# Altium PCB 175-00024_rev1, Backplane, 19-inch Rack_OLD.PcbDoc (part 1 of 3)
Units mil, origin at the board's own origin, x right, y up, seen from the top; angles counter-clockwise.
Board outline 8400 x 10183.07 mil, 7 copper layers (Top Layer (*.GTL), Mid-Layer 1, +24V, RTN, +12V, Signal GND, Bottom Layer); 183 components, 151 nets, 1419 pads, 357 vias.
Unrouted connection lines stored in the file: 135.
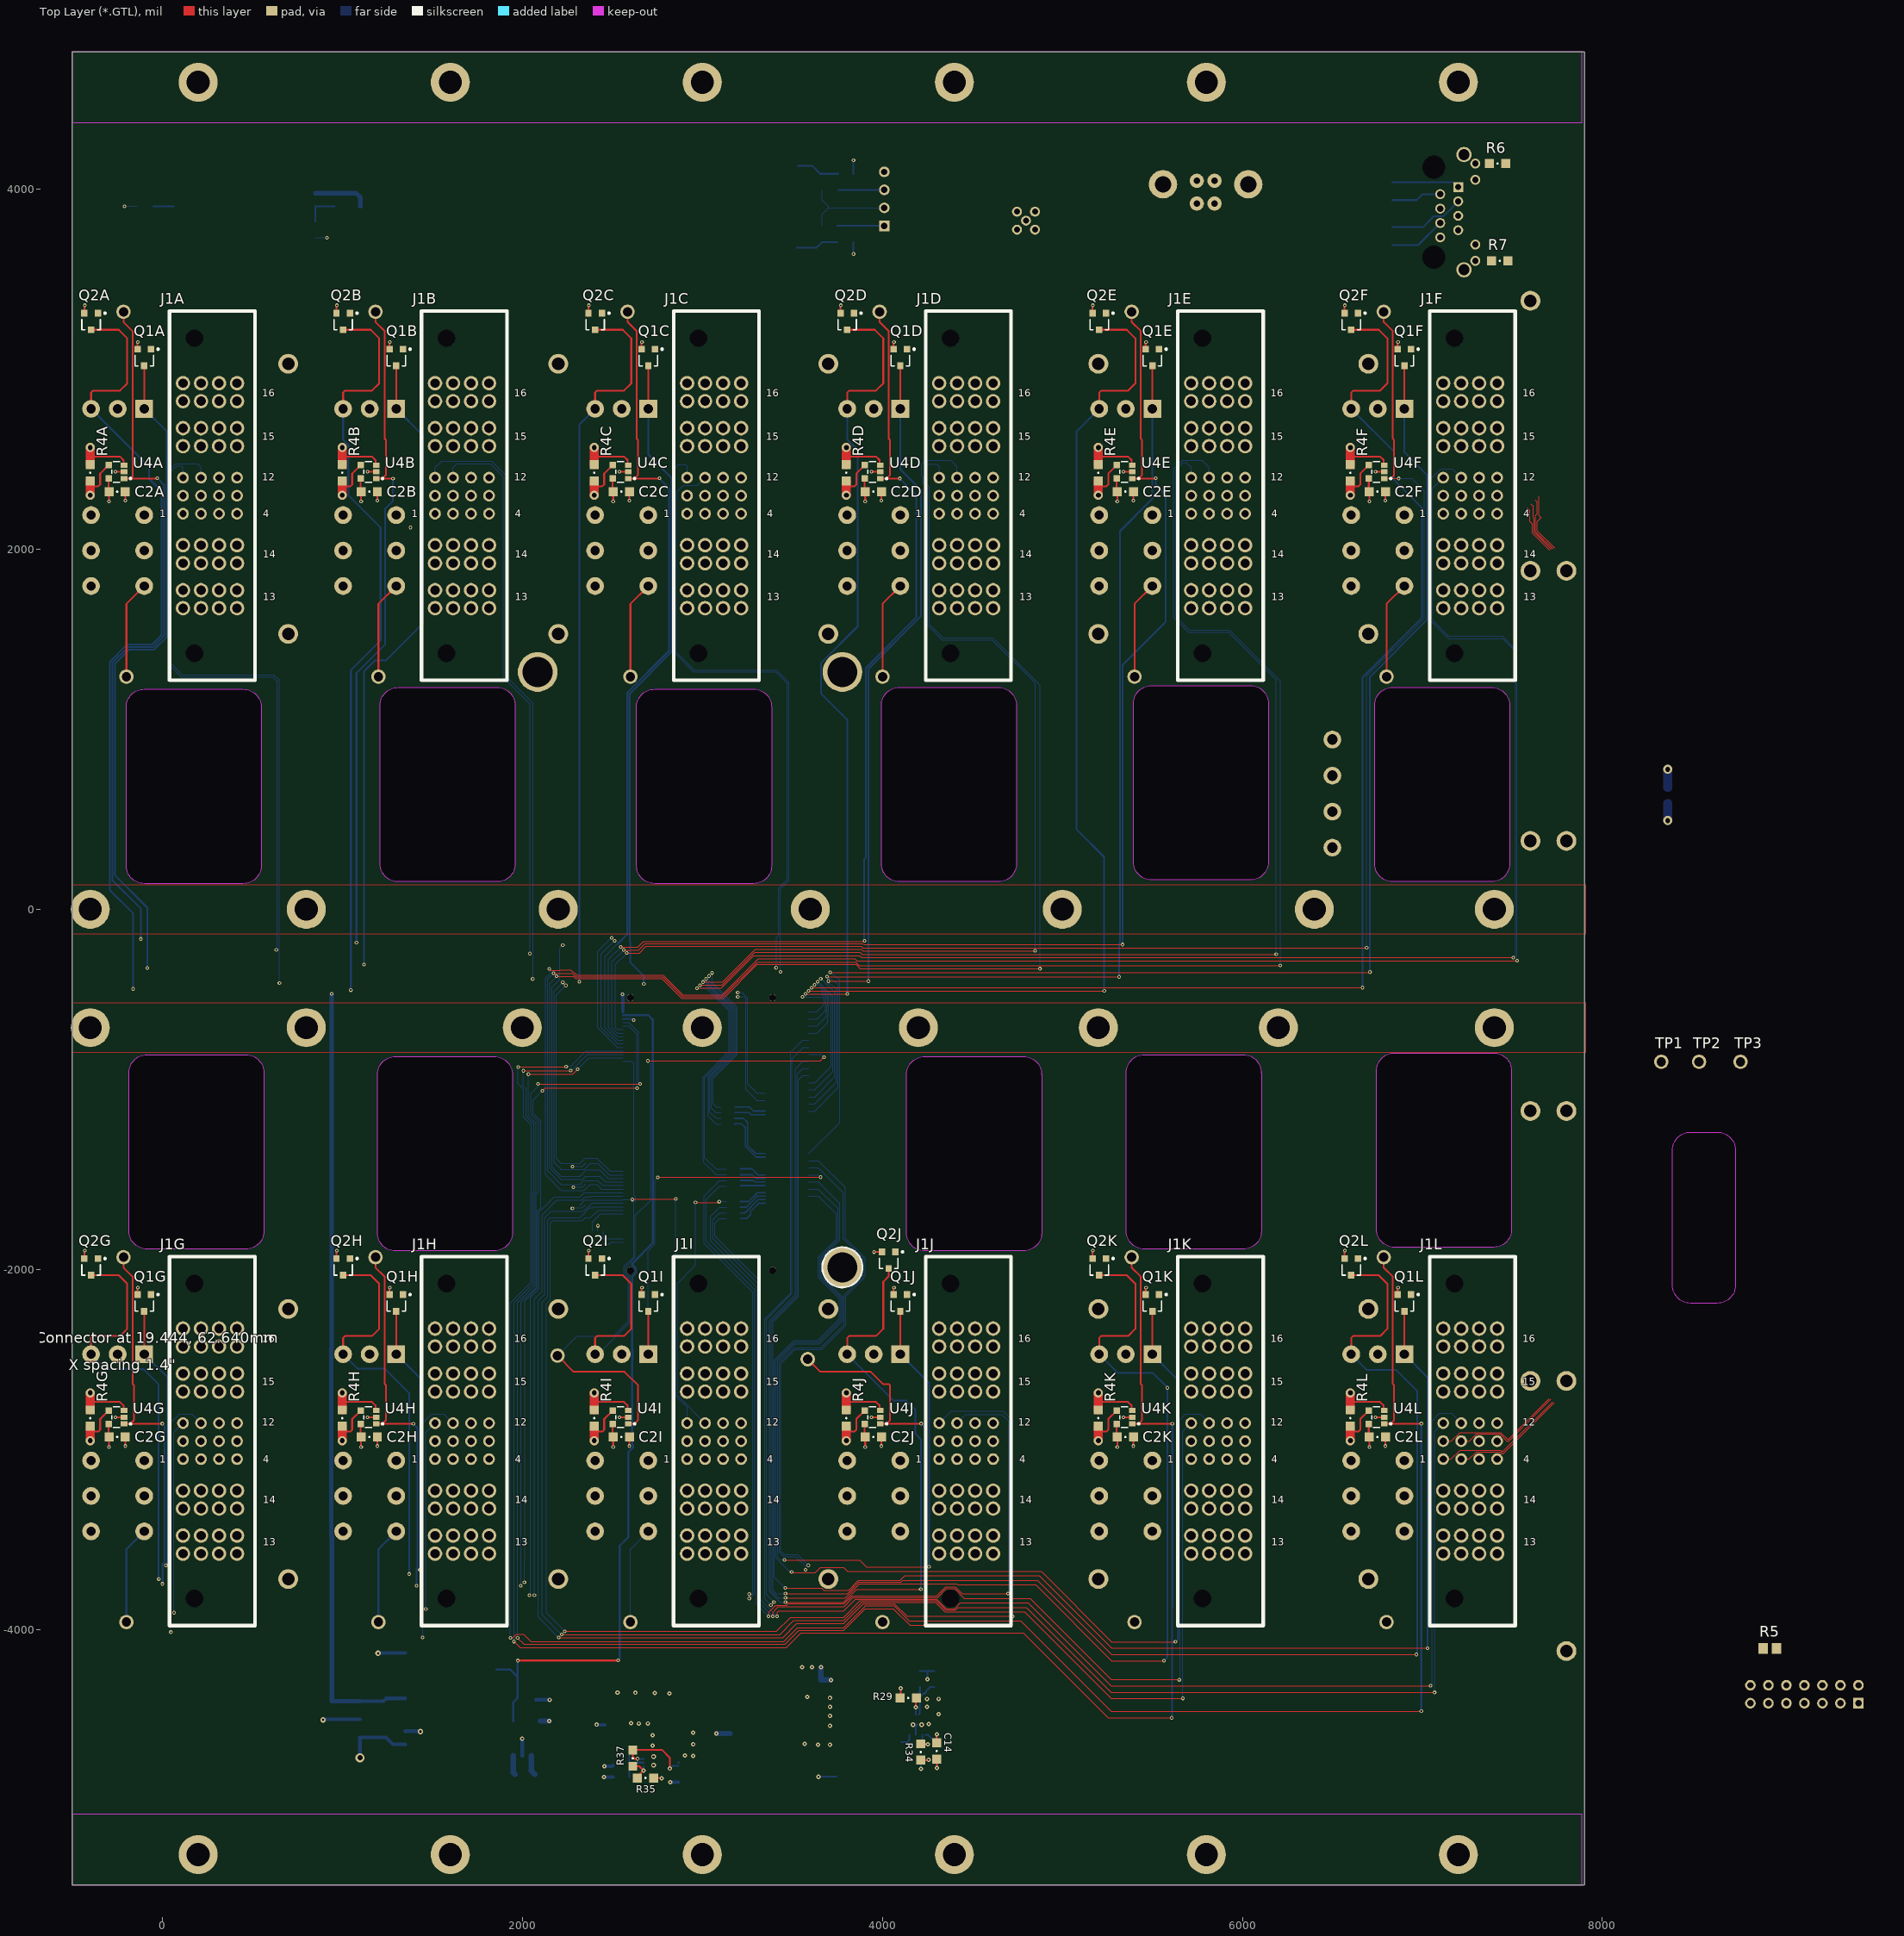
[diagram p0: Top Layer (*.GTL) view]
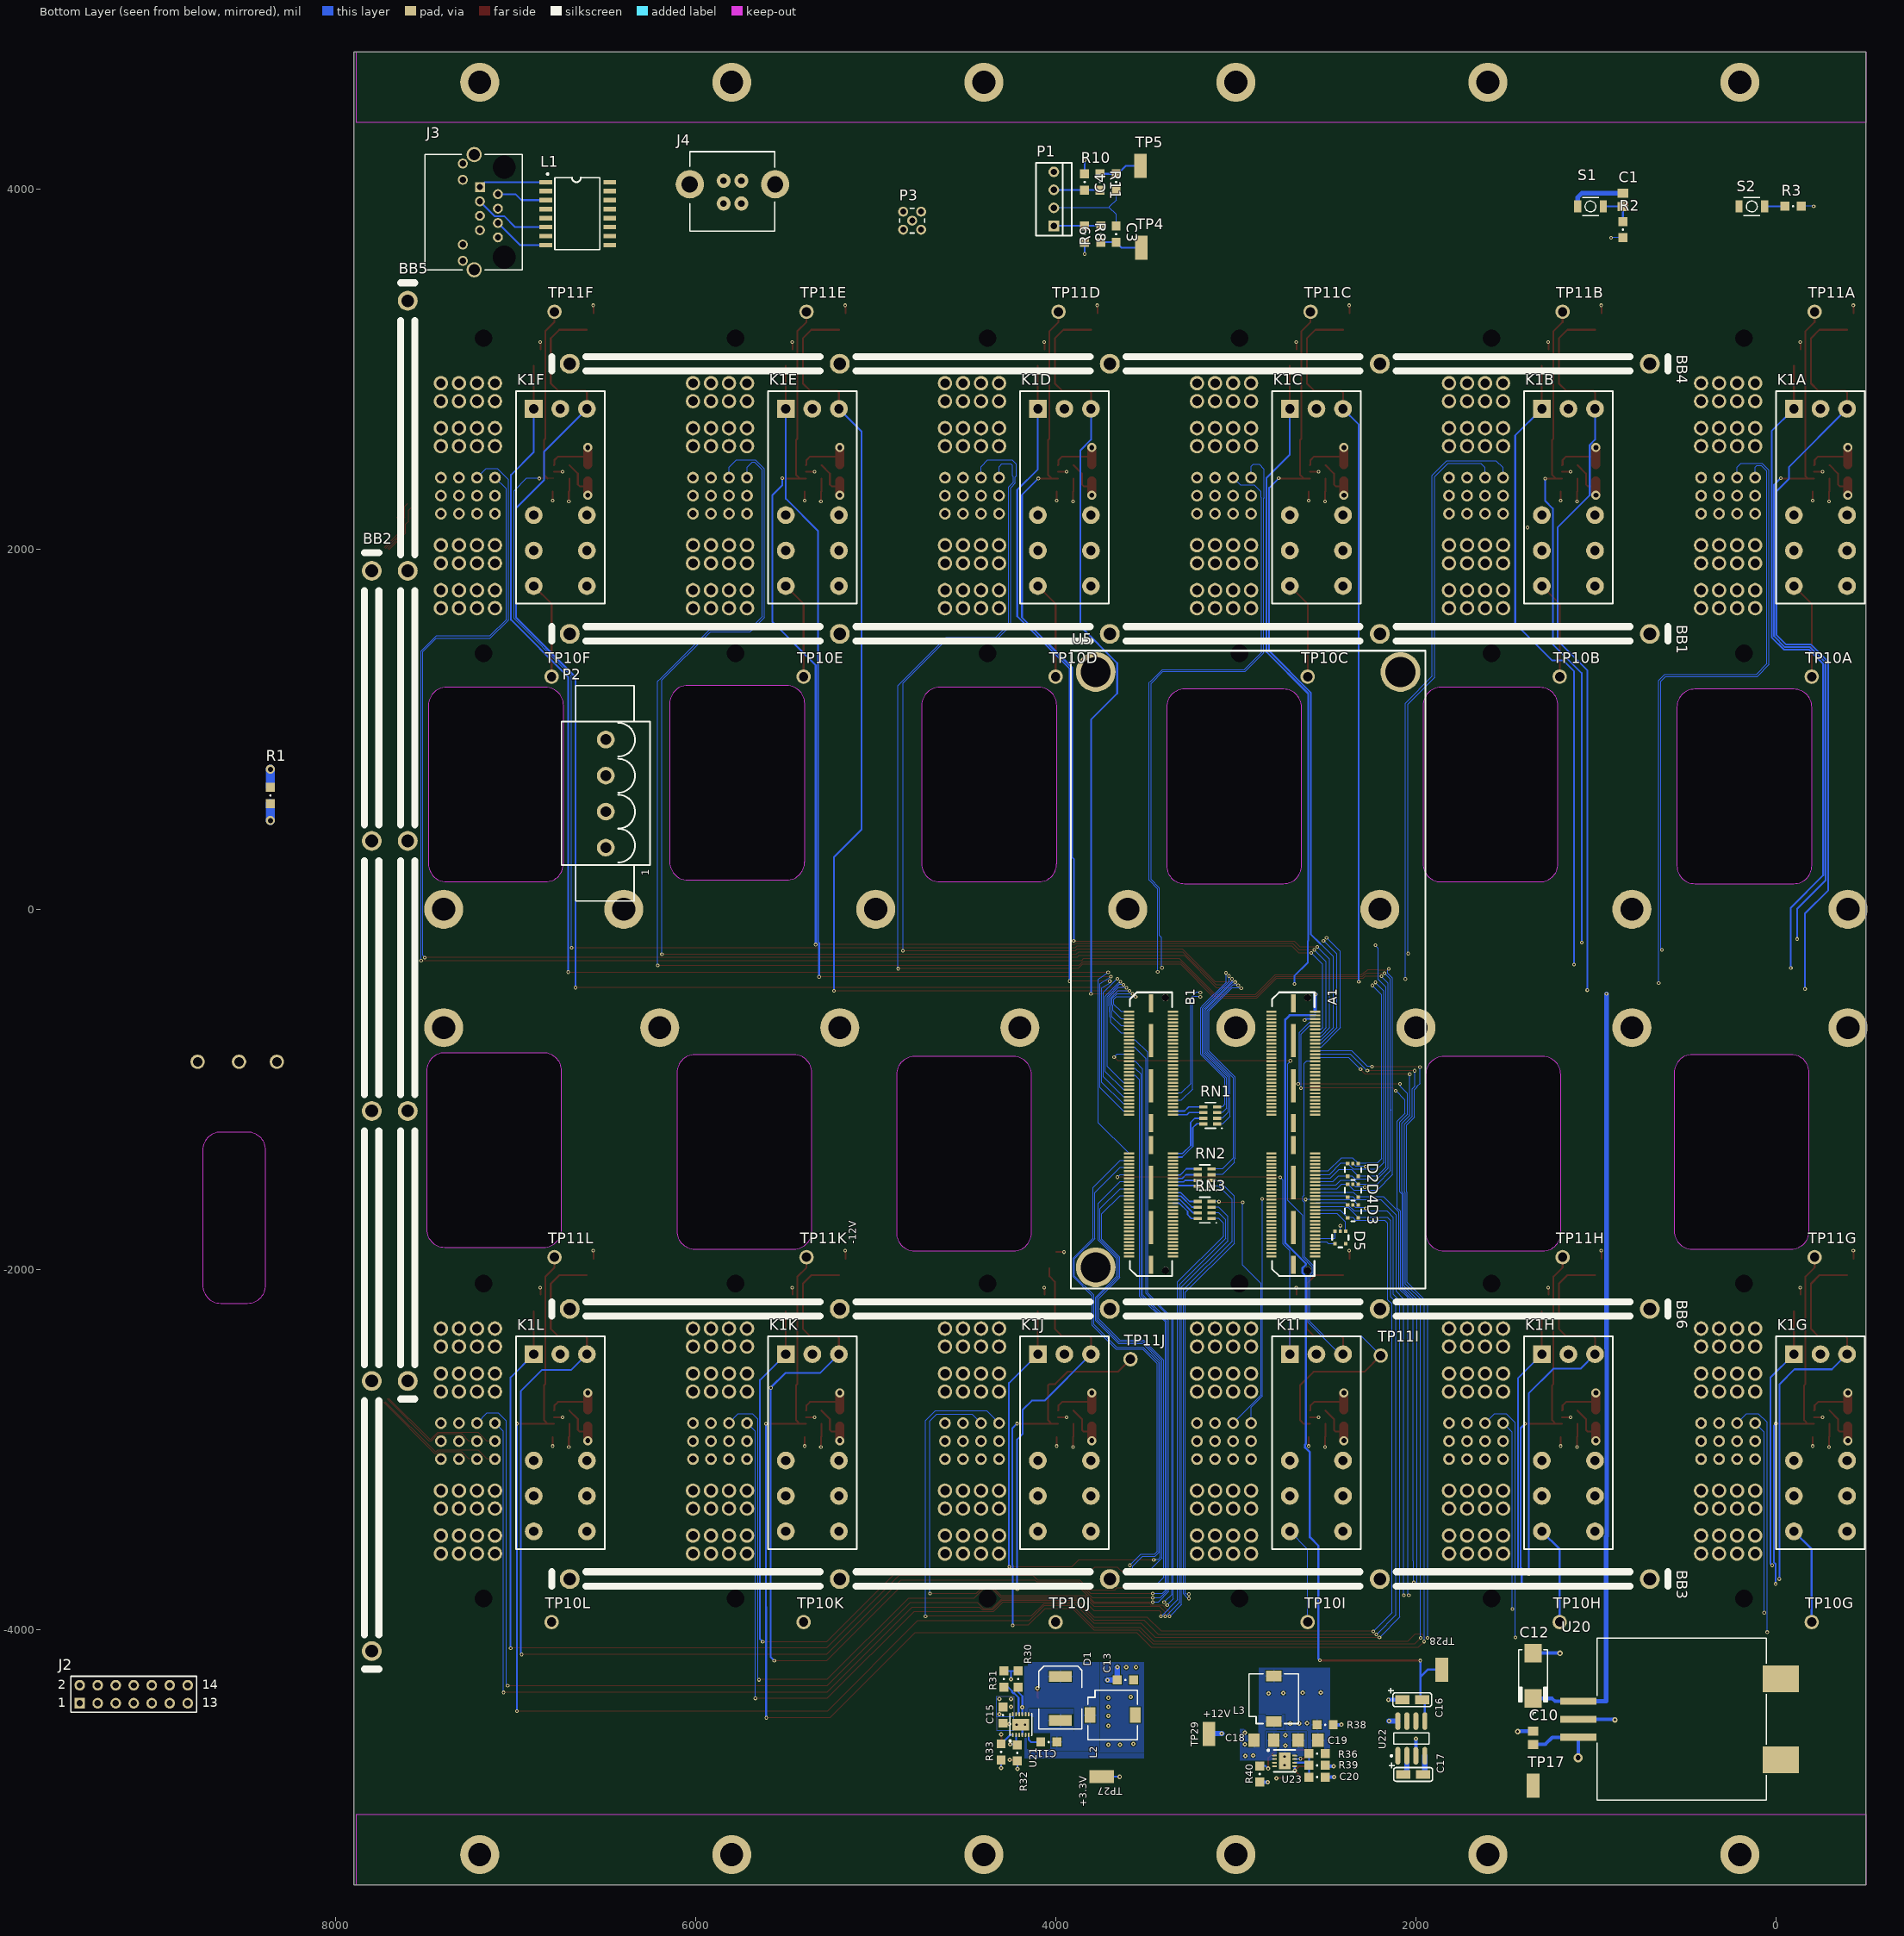
[diagram p1: Bottom Layer view, seen from below]
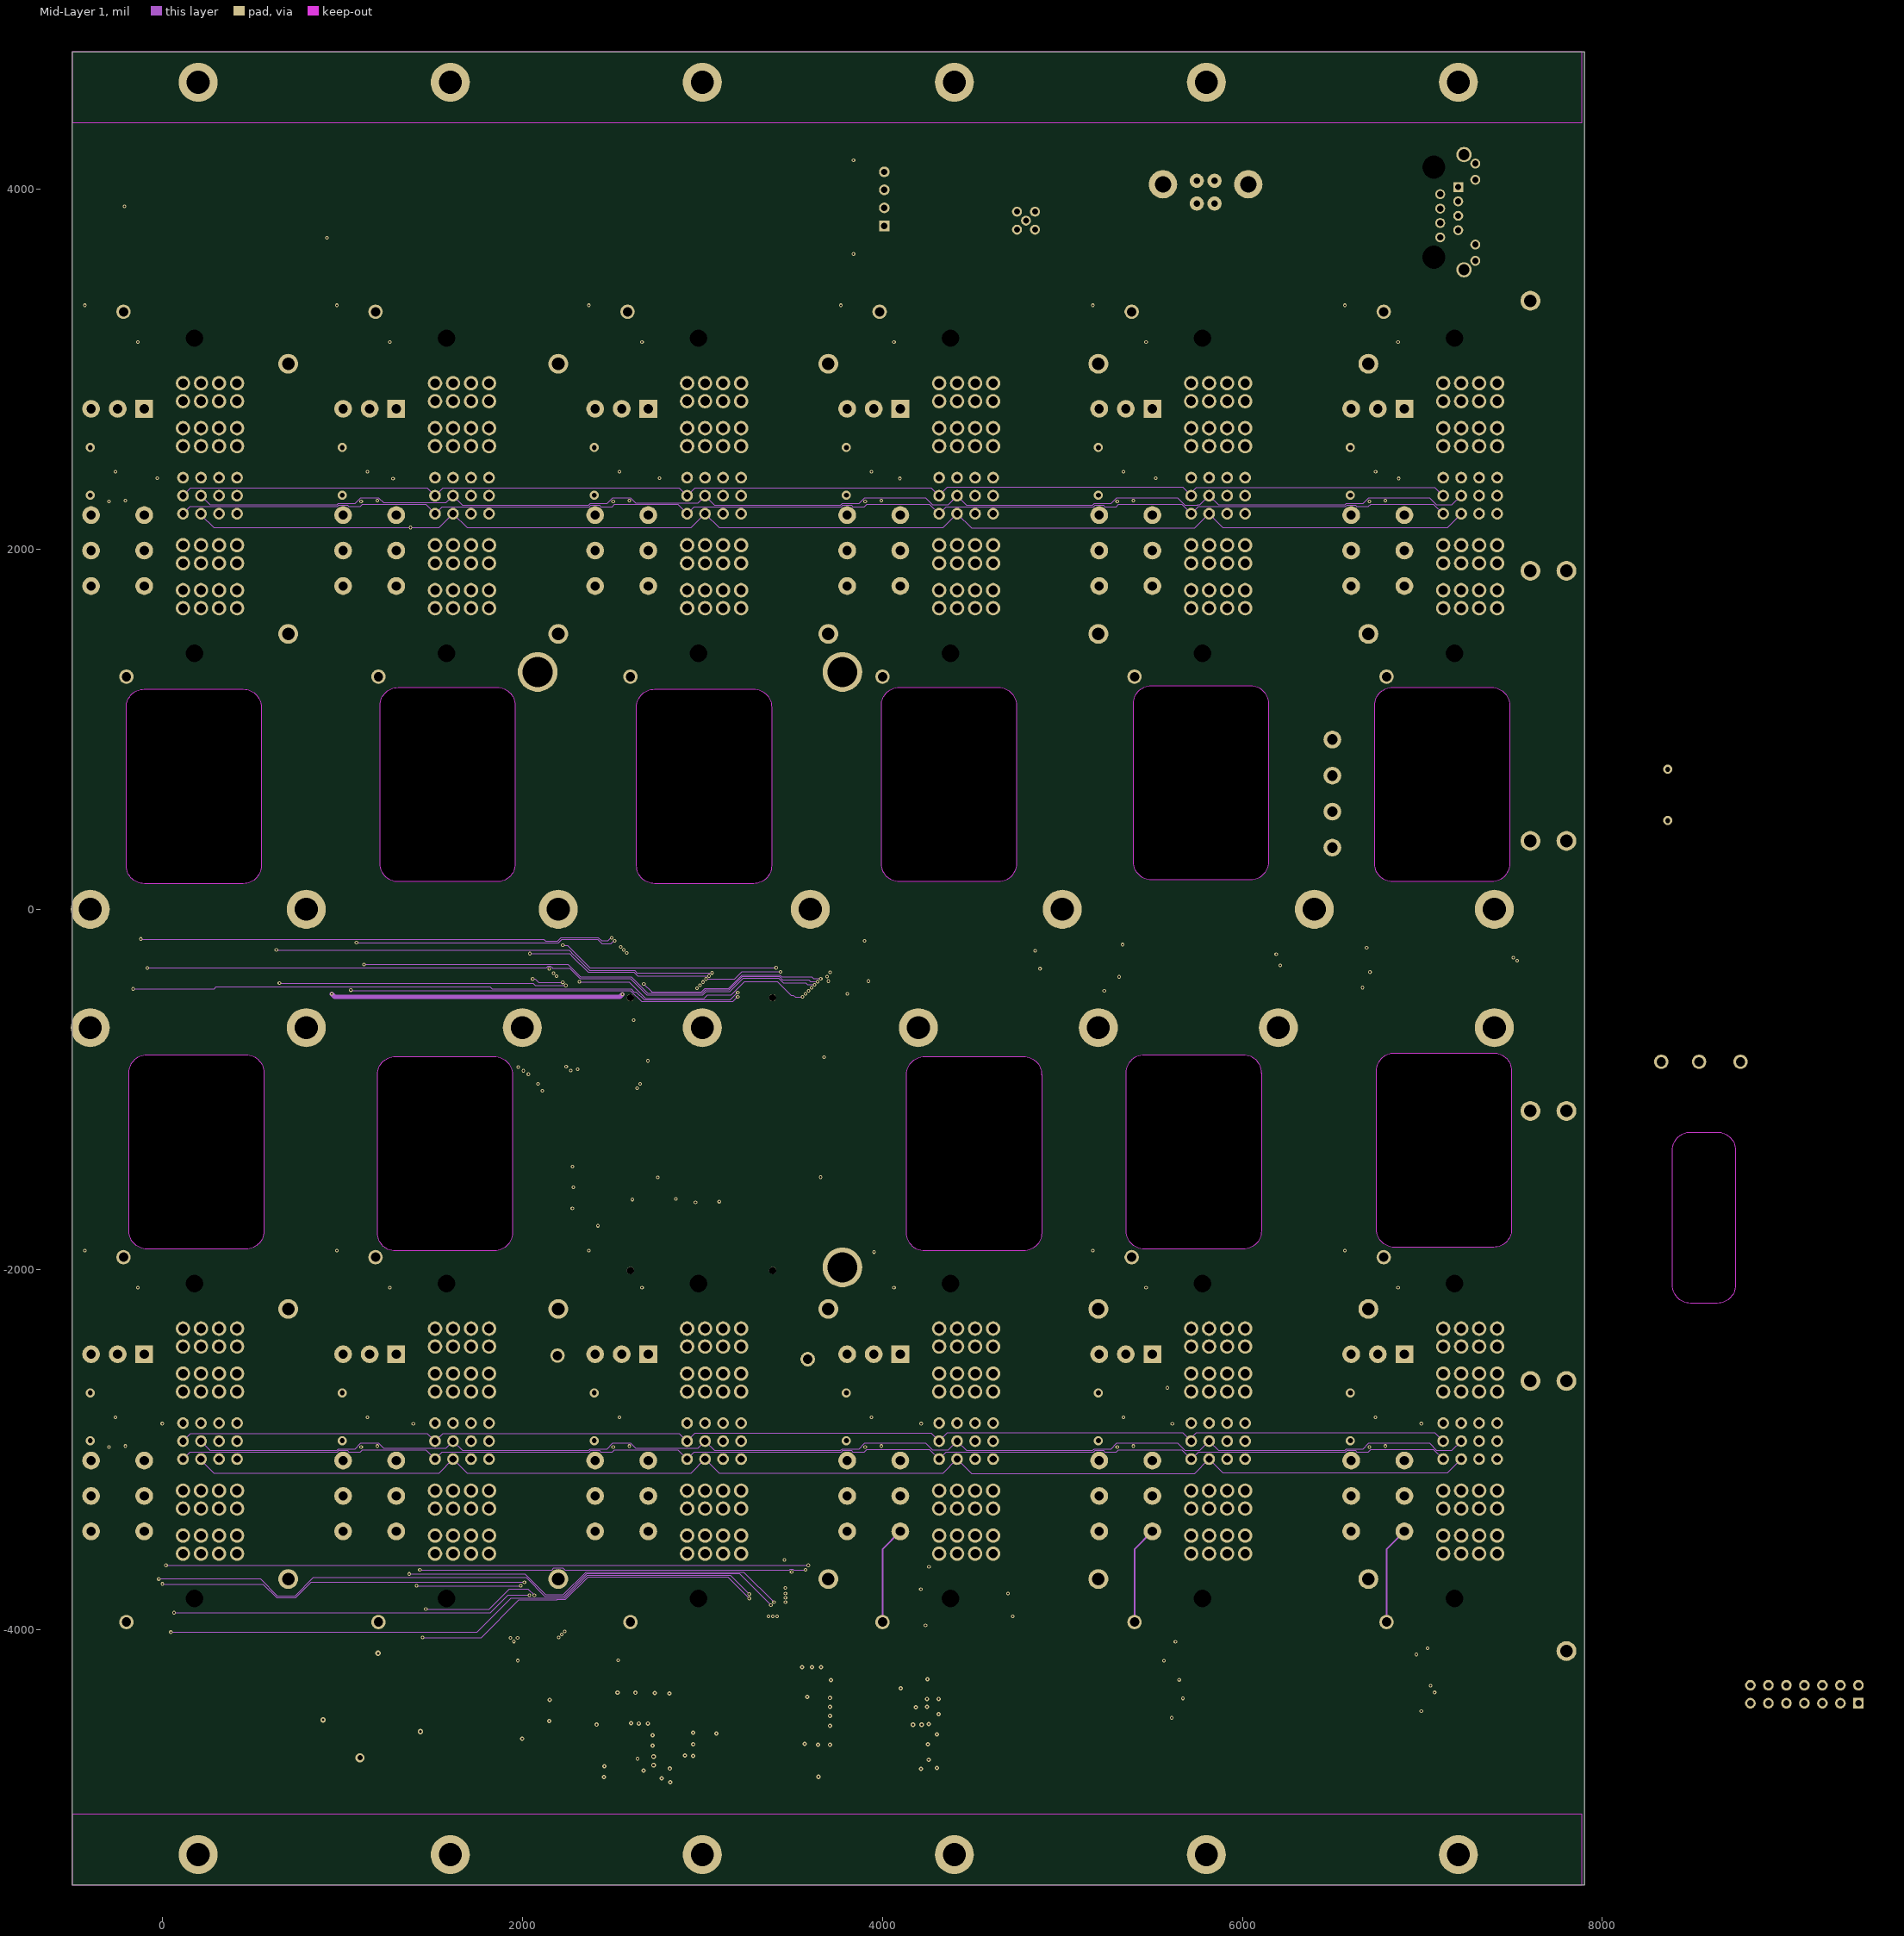
[diagram p2: Mid-Layer 1]
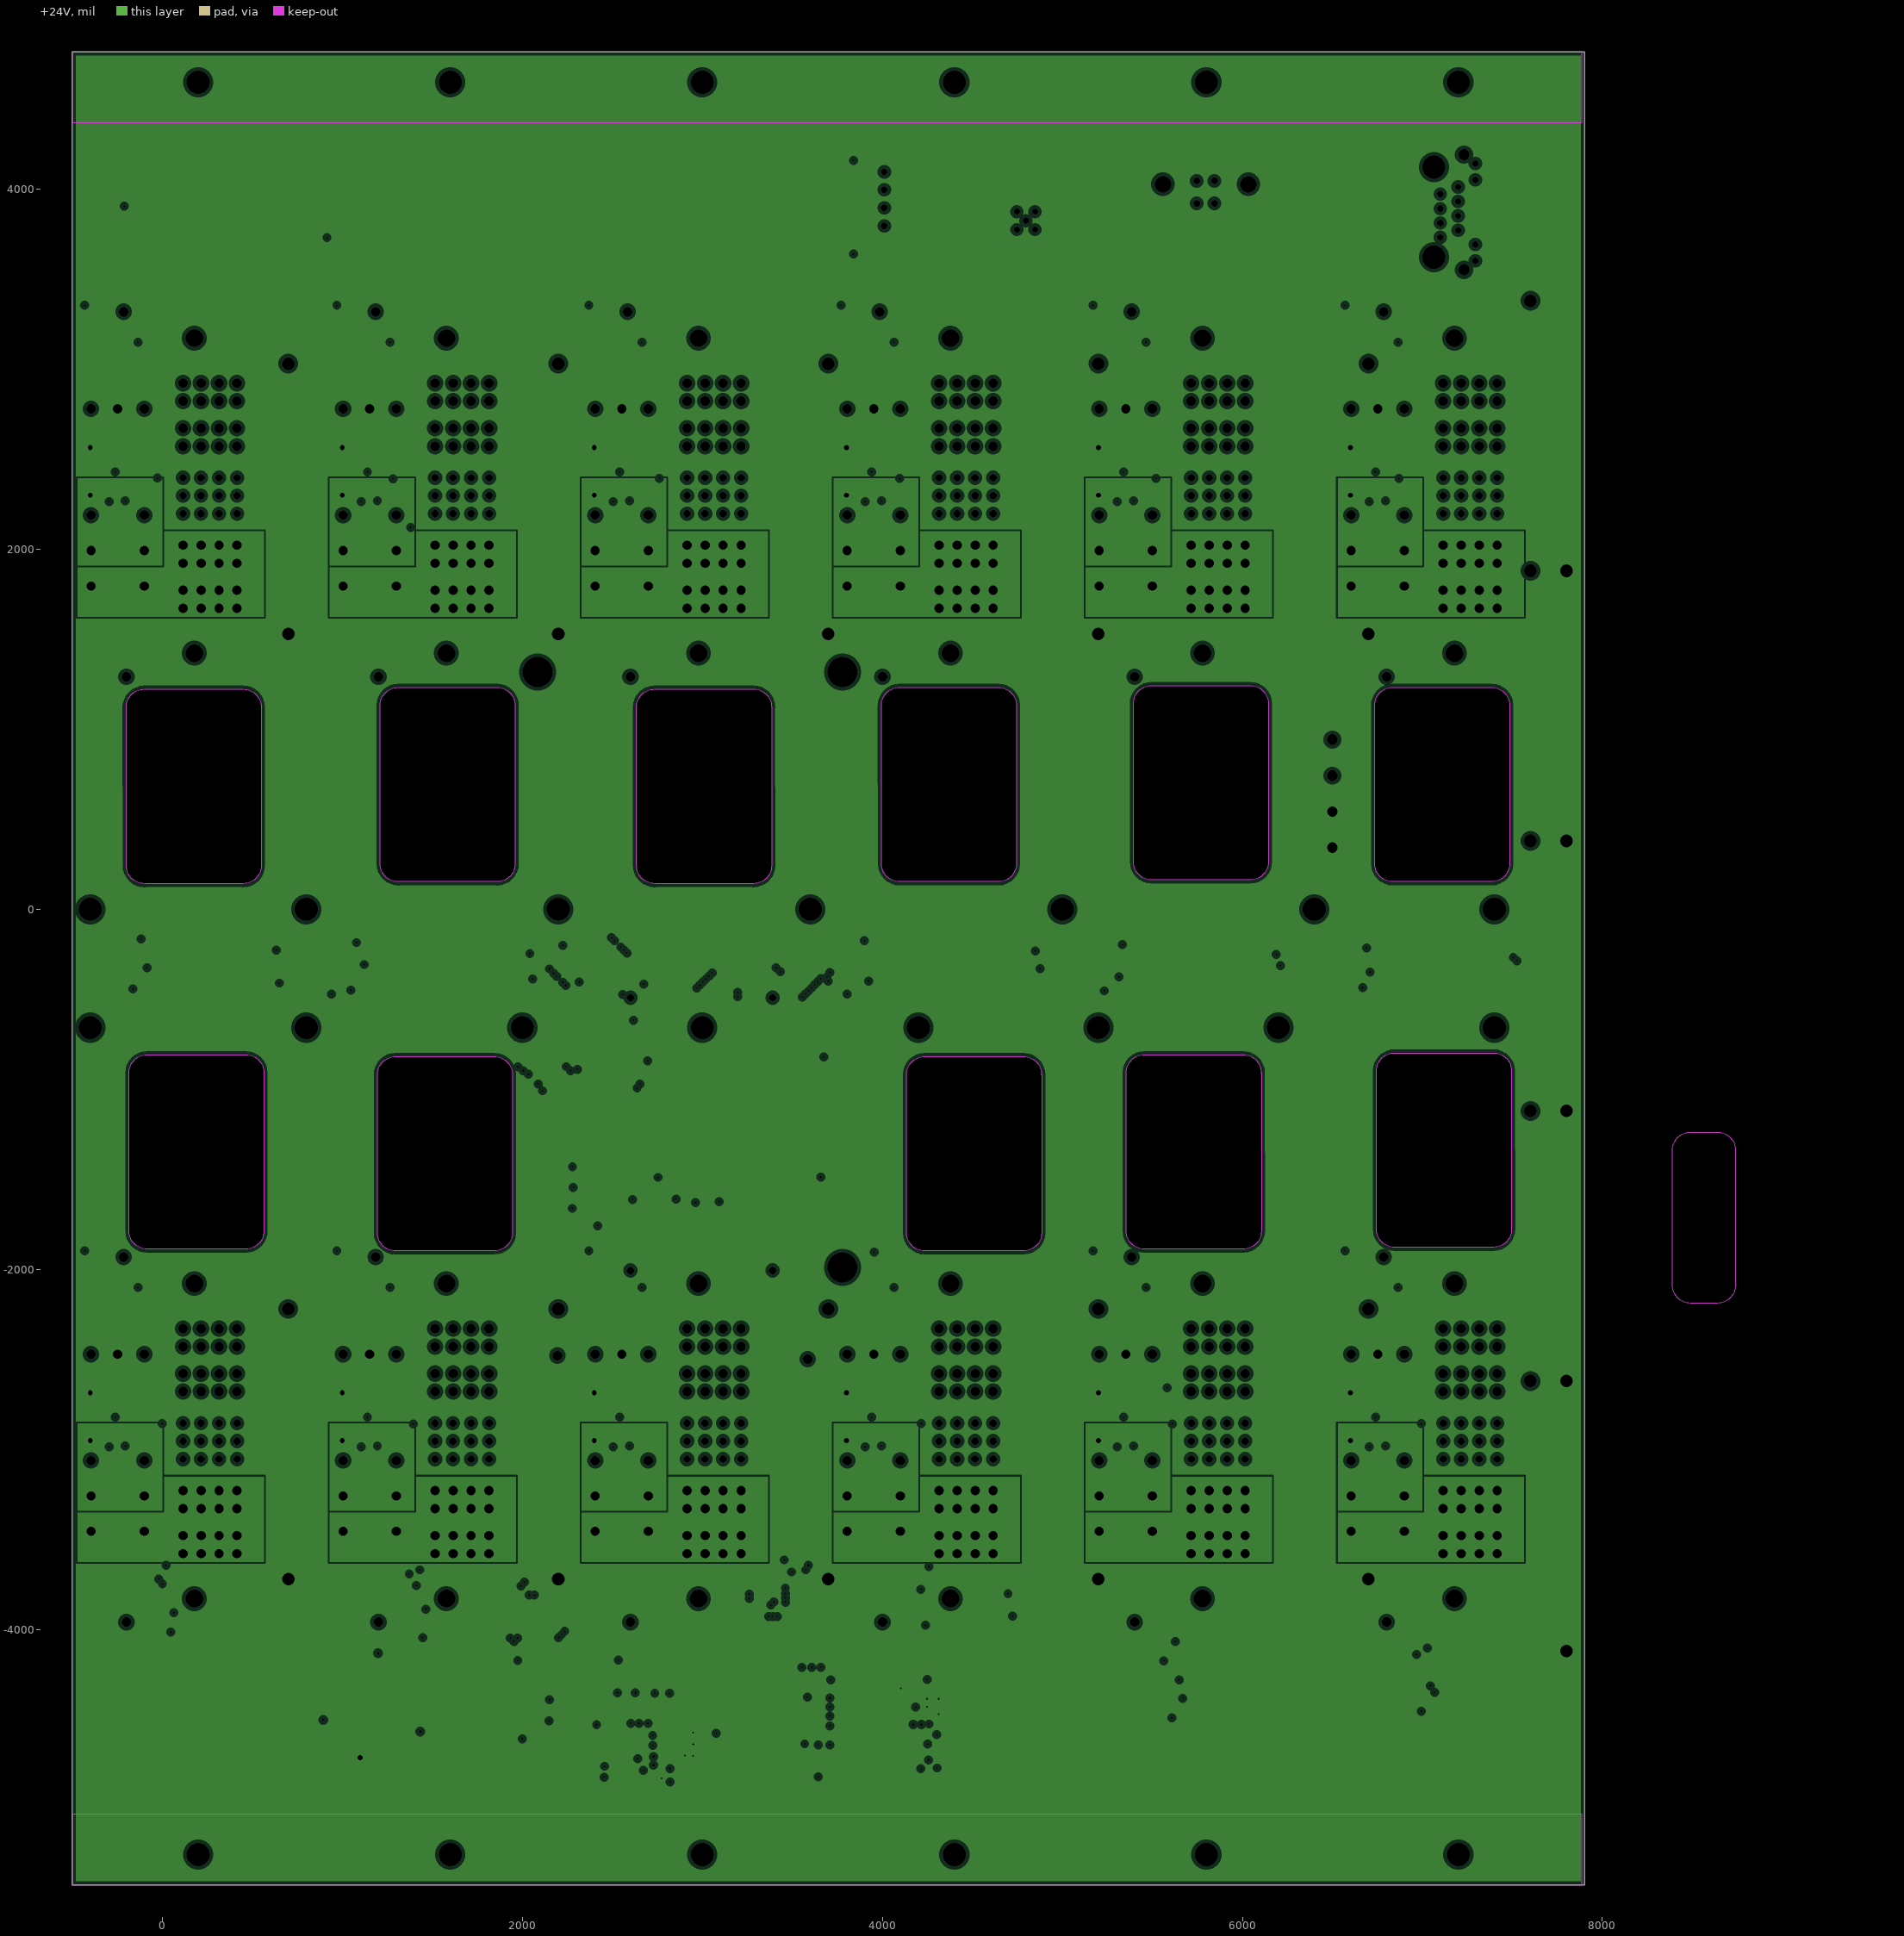
[diagram p3: +24V, clearances drawn from the general rule]
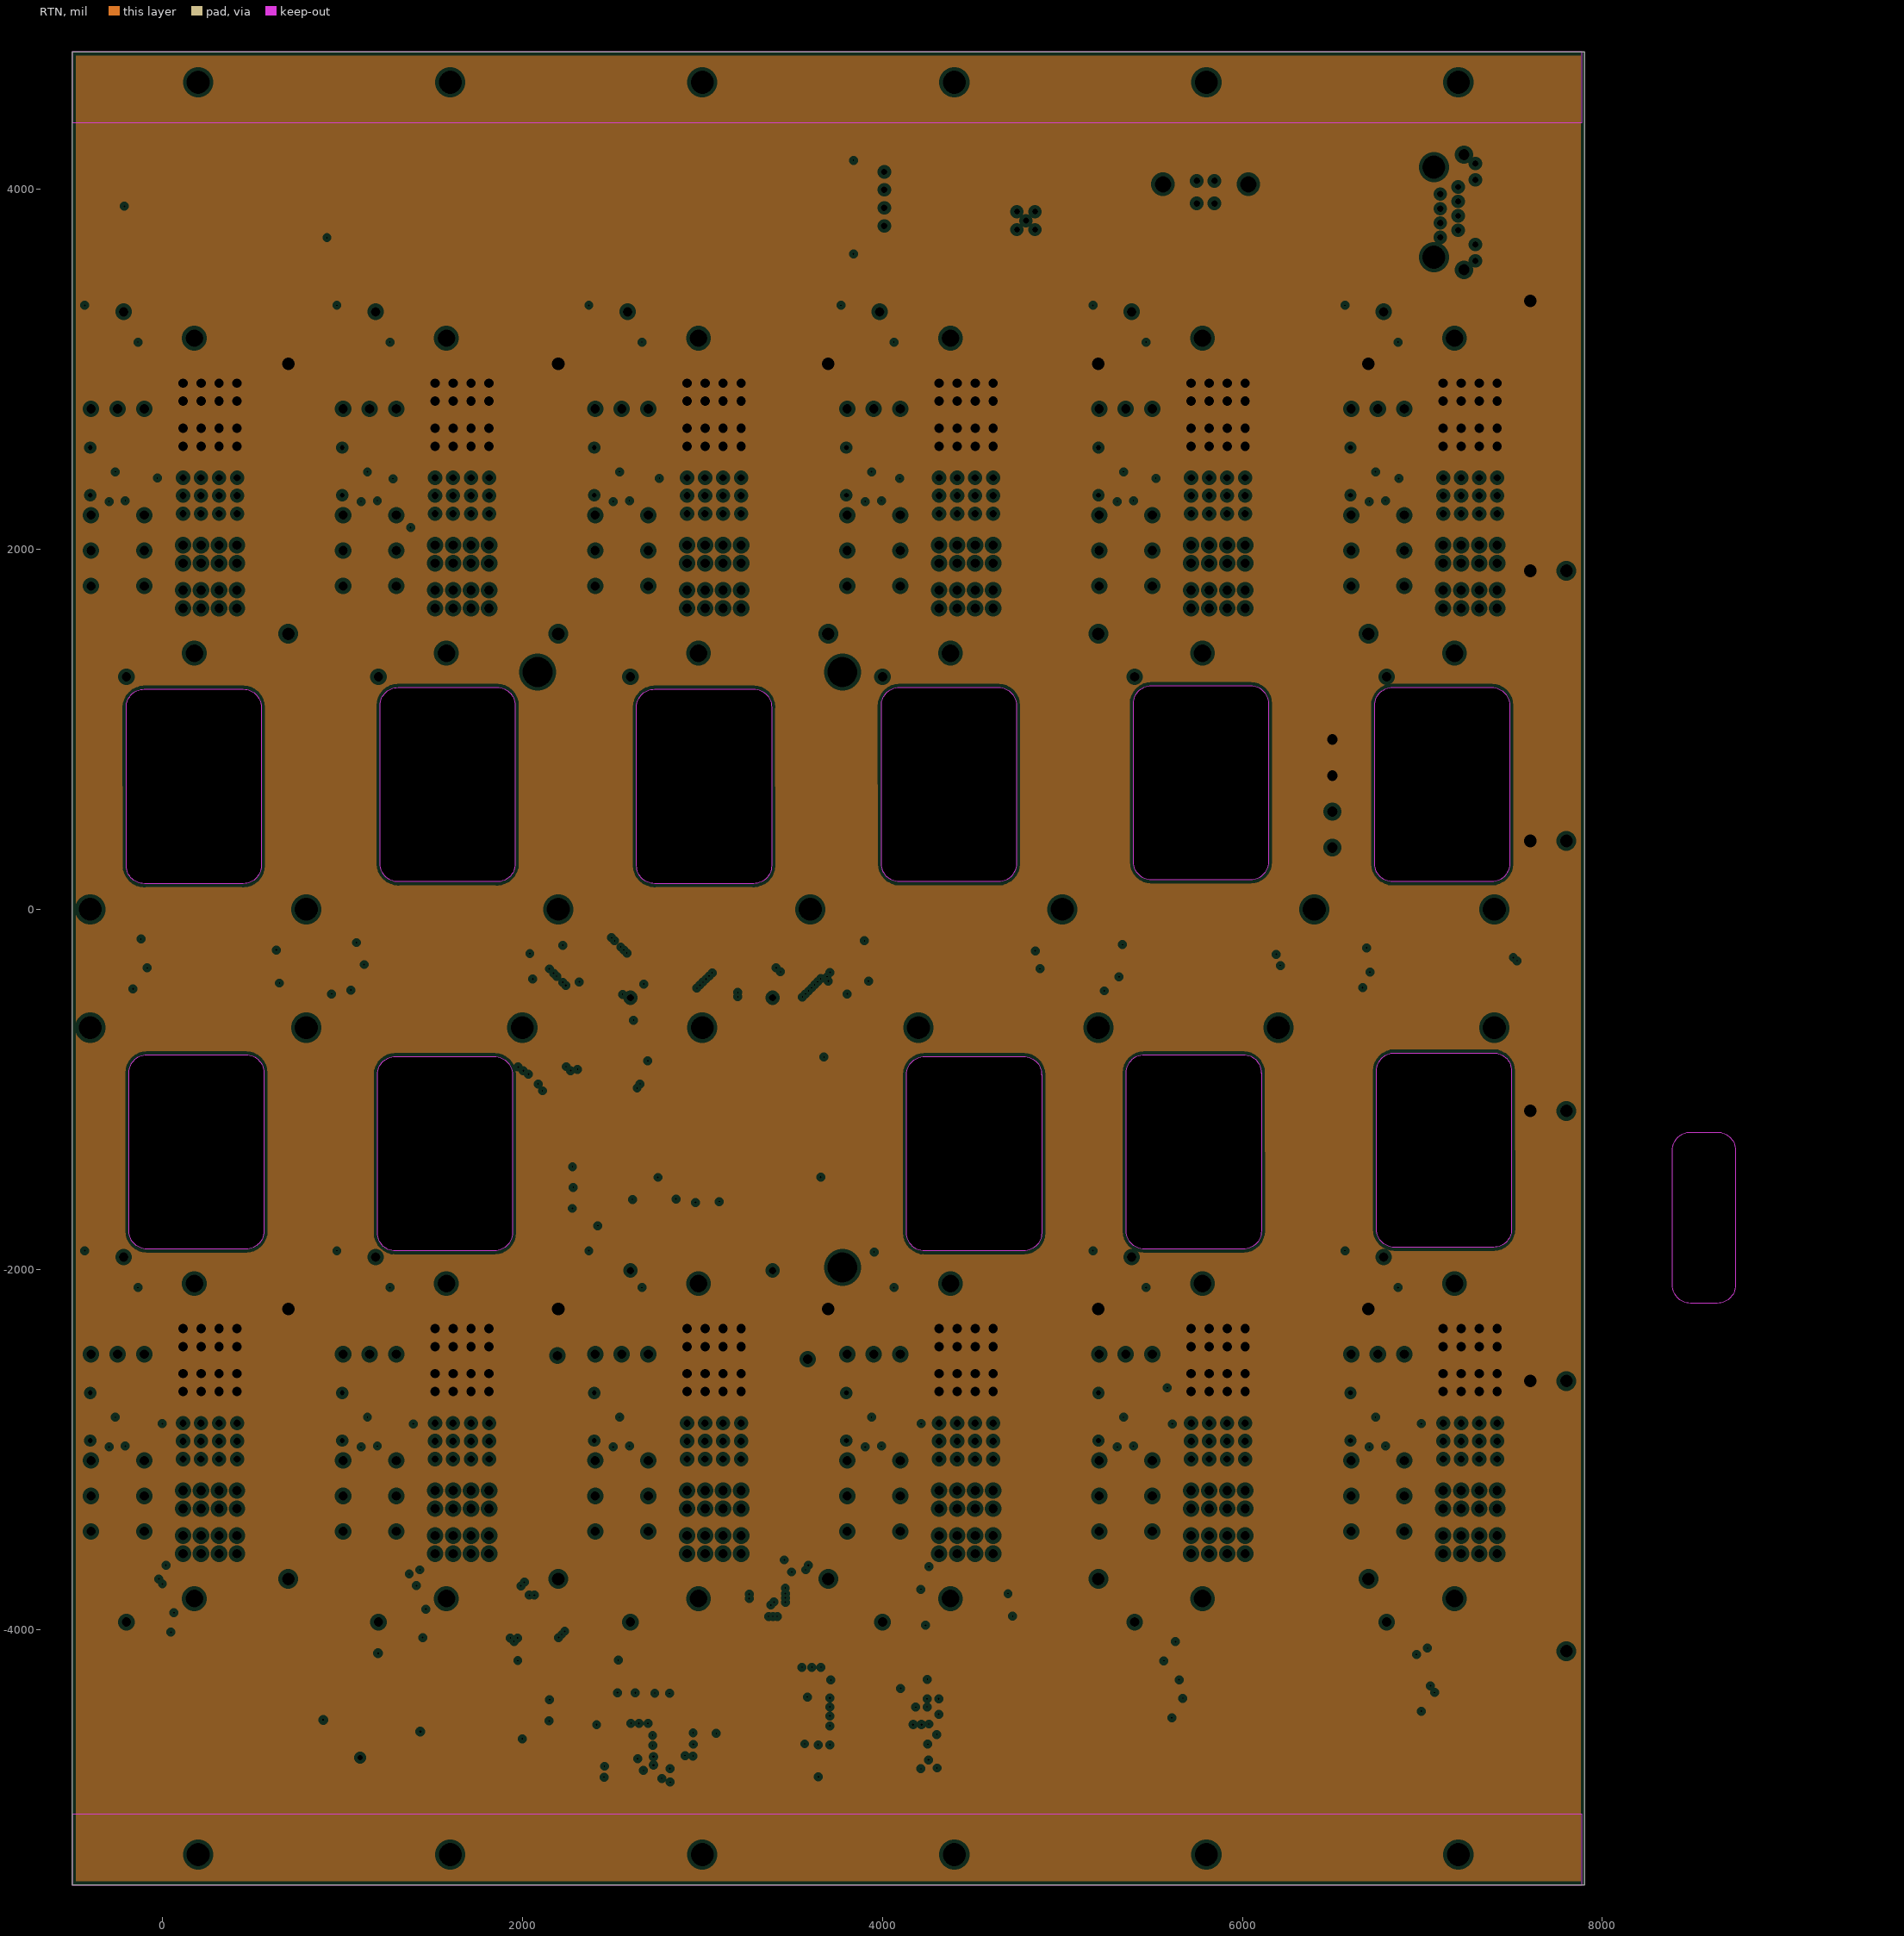
[diagram p4: RTN, clearances drawn from the general rule]
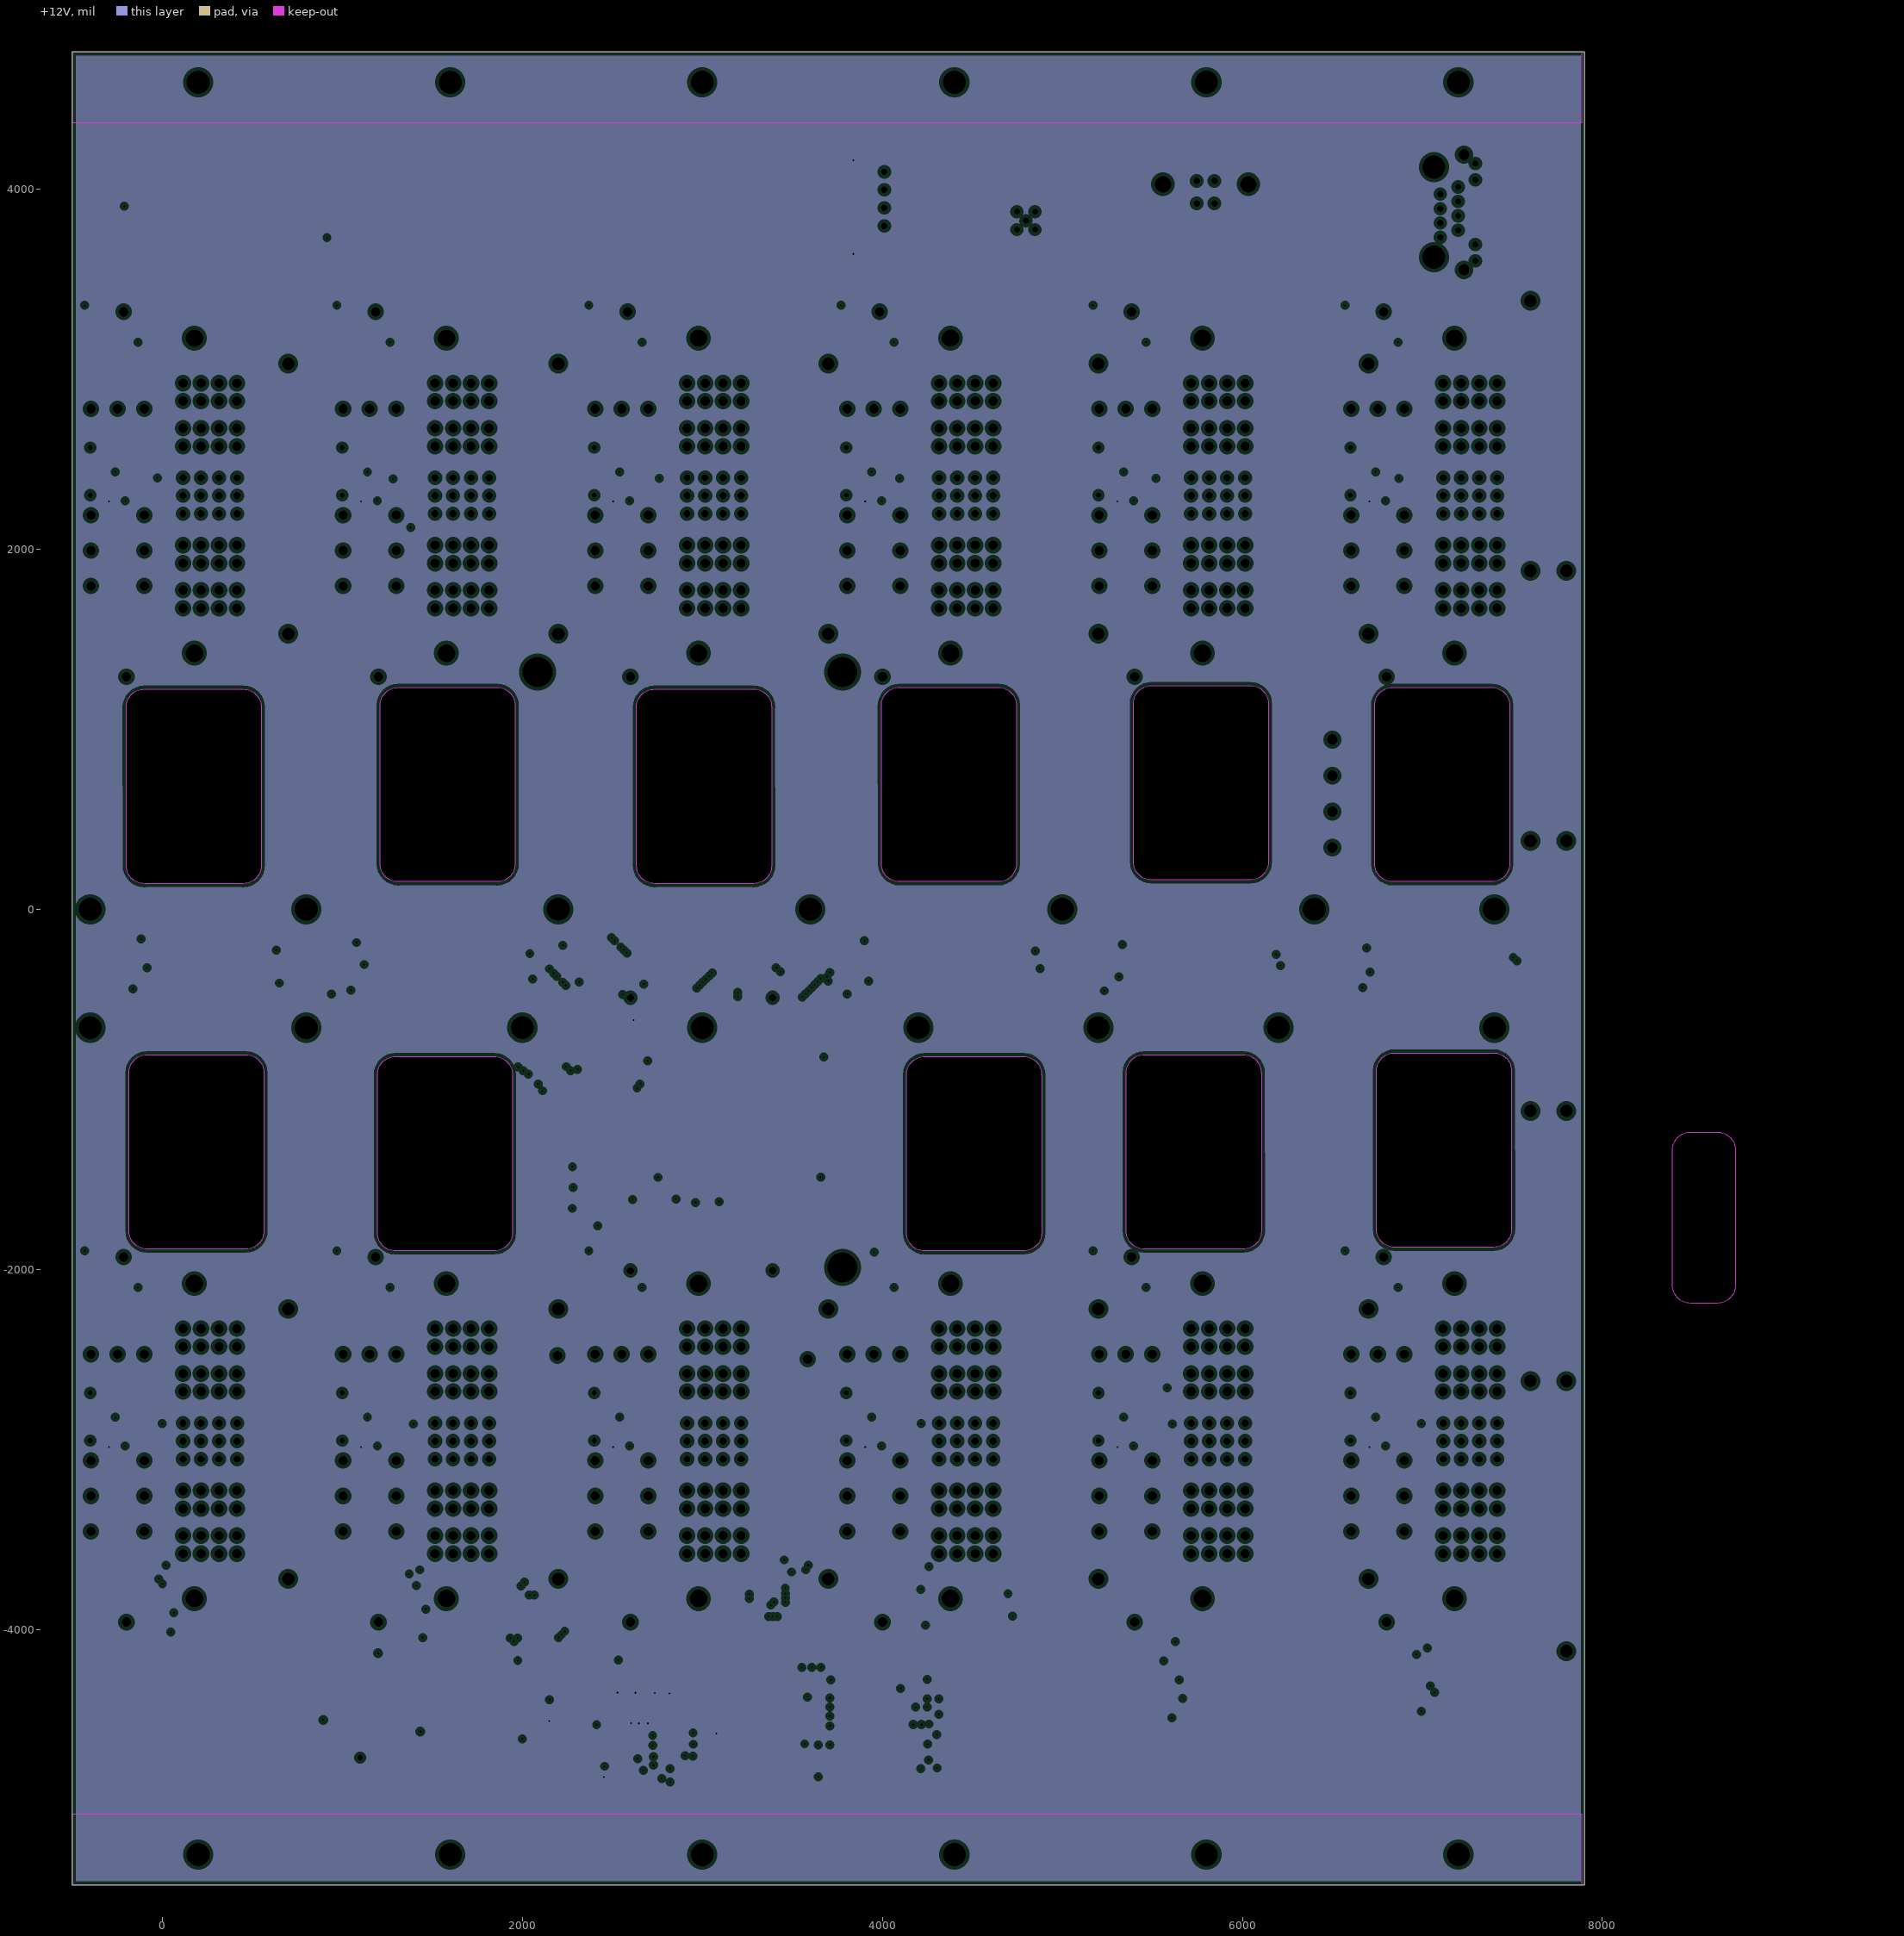
[diagram p5: +12V, clearances drawn from the general rule]
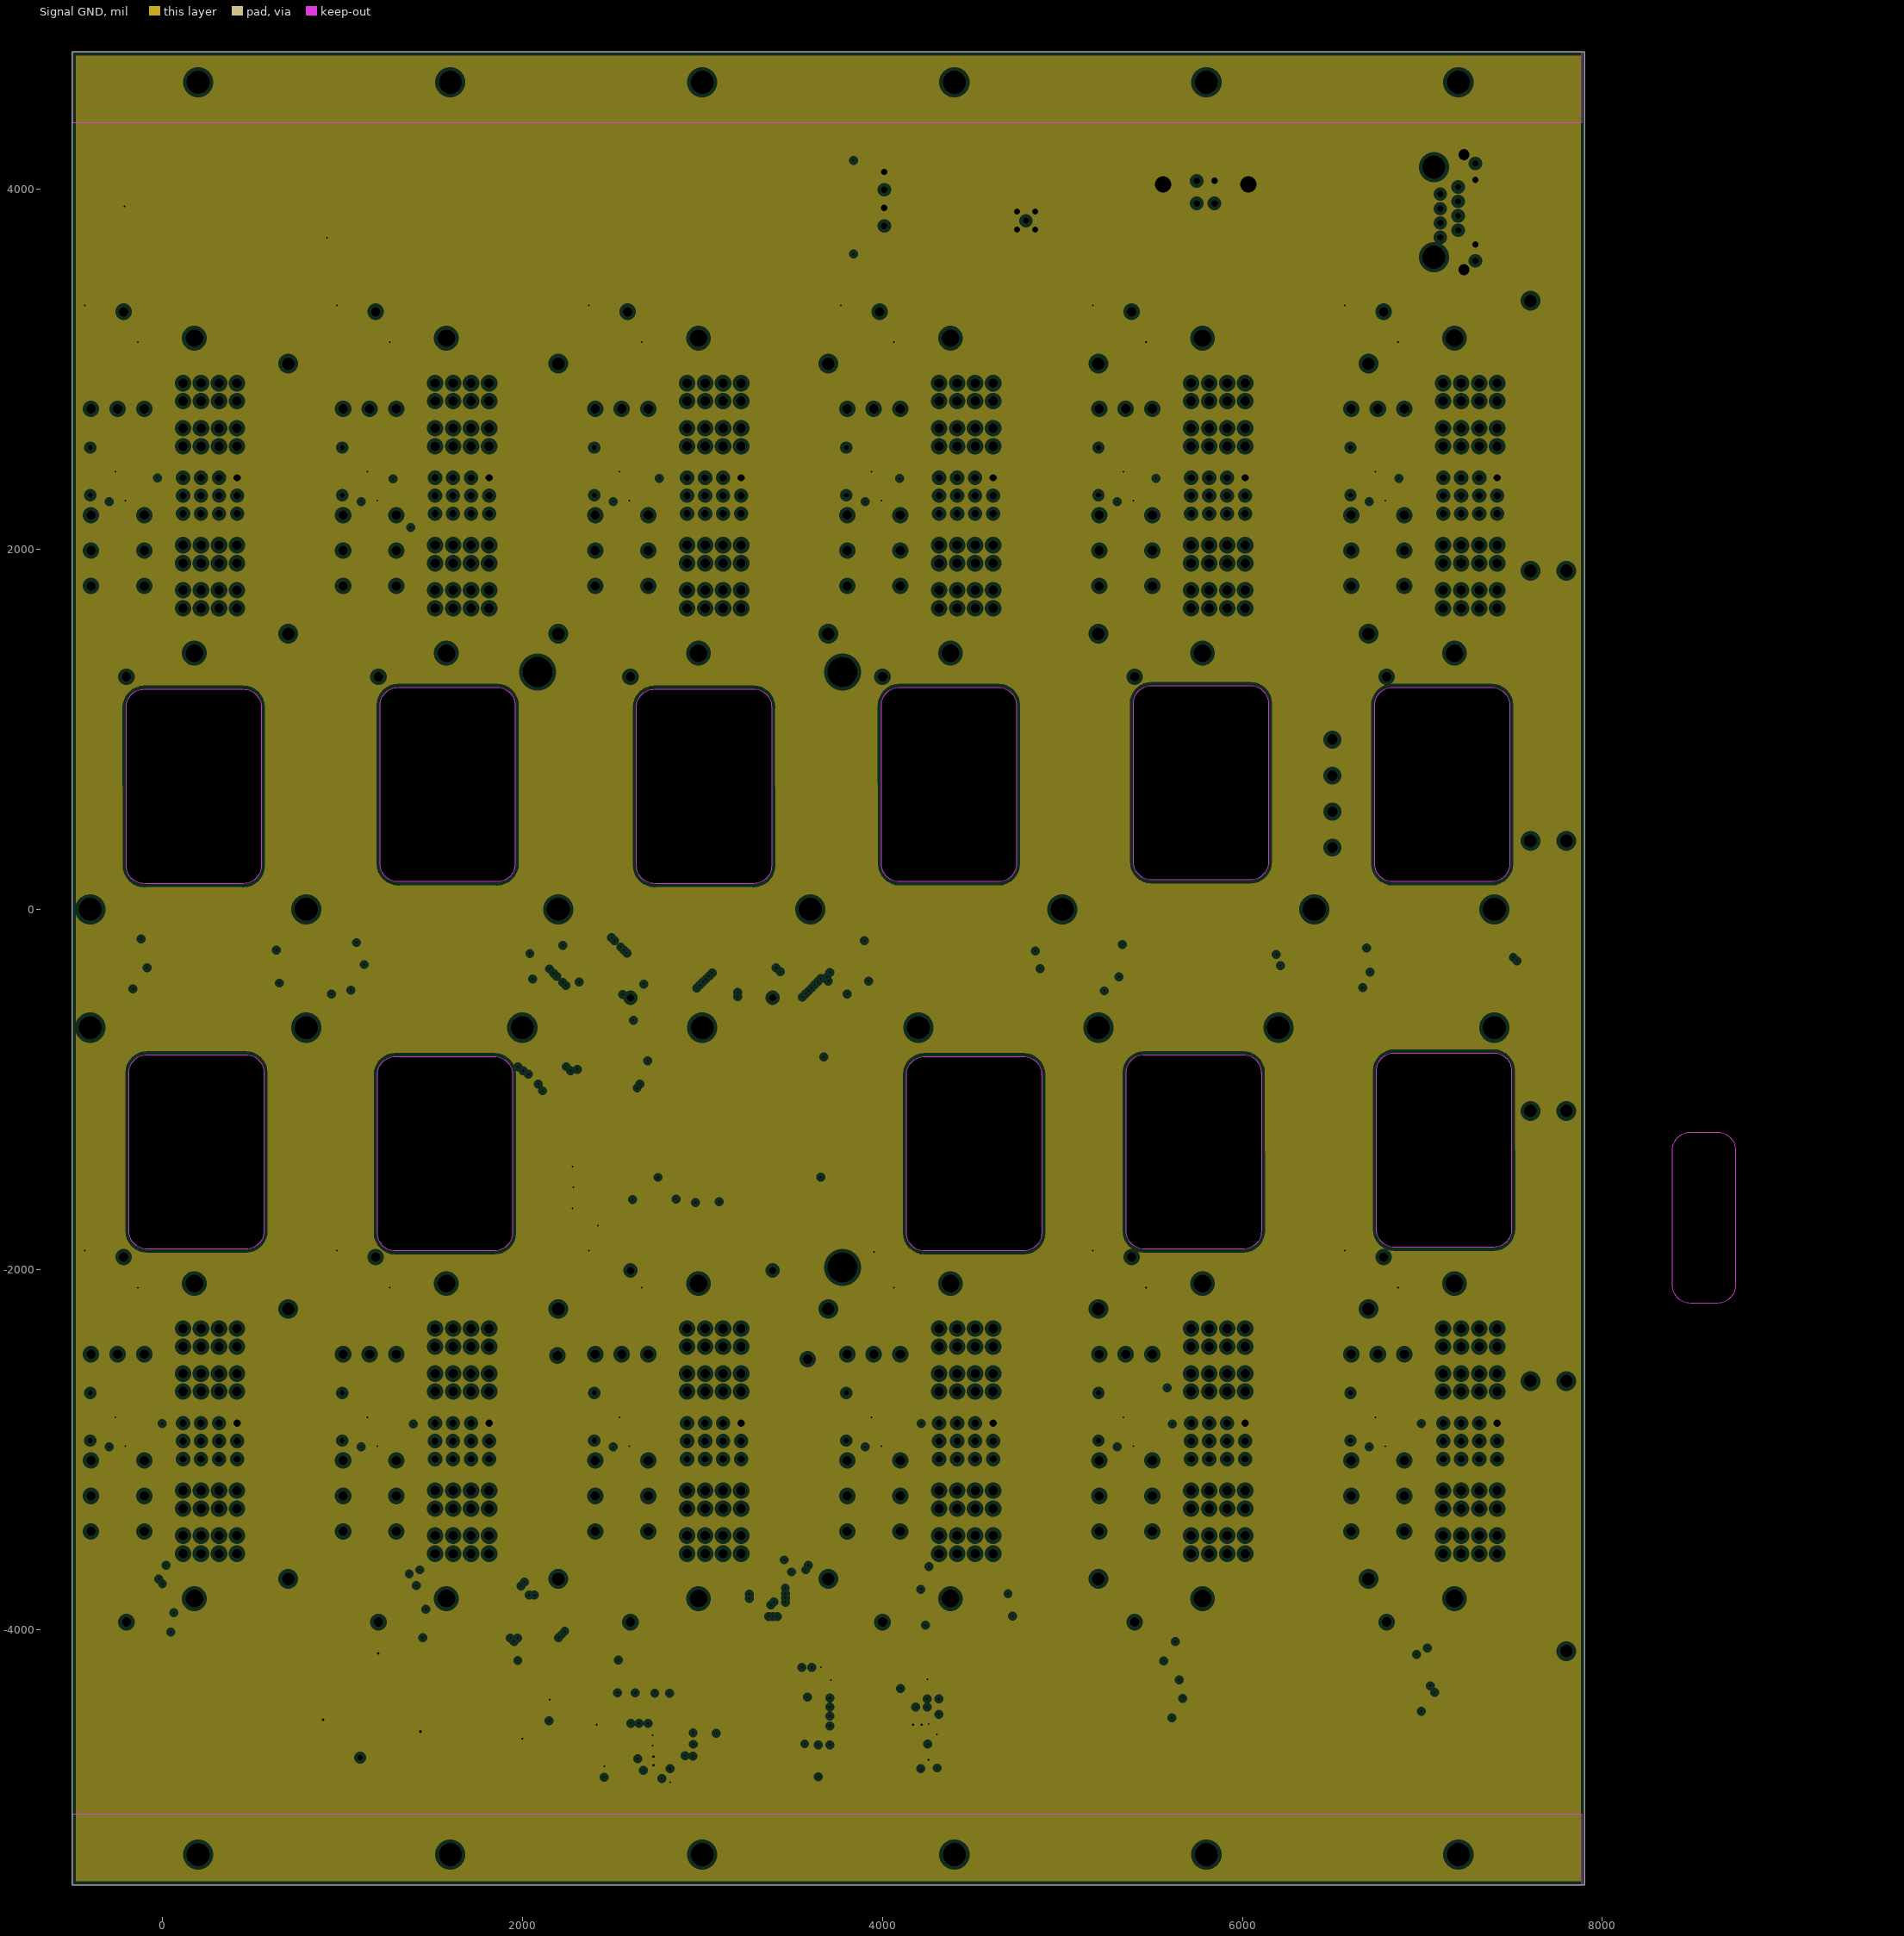
[diagram p6: Signal GND, clearances drawn from the general rule]

## Layer stack, top to bottom
Top Layer (*.GTL): signal copper 1.4
Dielectric: core 12.6, FR-4, Dk 4.8
Mid-Layer 1: signal copper 1.4
Dielectric: prepreg 12.6, FR-4, Dk 4.8
+24V: plane copper 2.8, net (Multiple Nets)
Dielectric: core 12.6, FR-4, Dk 4.8
RTN: plane copper 2.8, net RTN
Dielectric: prepreg 12.6, FR-4, Dk 4.8
+12V: plane copper 1.4, net +12V
Dielectric: core 12.6, FR-4, Dk 4.8
Signal GND: plane copper 1.4, net GND
Dielectric: prepreg 12.6, FR-4, Dk 4.8
Bottom Layer: signal copper 1.4

## Board outline
-500,-5420.08 7900,-5420.08 7900,4762.99 -500,4762.99
cut-out: 565.24,-908.21 565.24,-1787.24 cw(c465.24,-1787.24) 465.24,-1887.24 464.76,-1887.72 -84.76,-1887.72 cw(c-84.76,-1787.72) -184.76,-1787.72 -184.76,-907.72 cw(c-84.76,-907.72) -84.76,-807.72 464.76,-807.72 cw(c464.76,-907.72)
cut-out: 1945.24,-918.21 1945.24,-1797.24 cw(c1845.24,-1797.24) 1845.24,-1897.24 1844.76,-1897.72 1295.24,-1897.72 cw(c1295.24,-1797.72) 1195.24,-1797.72 1195.24,-917.72 cw(c1295.24,-917.72) 1295.24,-817.72 1844.76,-817.72 cw(c1844.76,-917.72)
cut-out: 4885.24,-918.21 4885.24,-1797.24 cw(c4785.24,-1797.24) 4785.24,-1897.24 4784.76,-1897.72 4235.24,-1897.72 cw(c4235.24,-1797.72) 4135.24,-1797.72 4135.24,-917.72 cw(c4235.24,-917.72) 4235.24,-817.72 4784.76,-817.72 cw(c4784.76,-917.72)
cut-out: 6105.24,-908.21 6105.24,-1787.24 cw(c6005.24,-1787.24) 6005.24,-1887.24 6004.76,-1887.72 5455.24,-1887.72 cw(c5455.24,-1787.72) 5355.24,-1787.72 5355.24,-907.72 cw(c5455.24,-907.72) 5455.24,-807.72 6004.76,-807.72 cw(c6004.76,-907.72)
cut-out: 7495.24,-898.21 7495.24,-1777.24 cw(c7395.24,-1777.24) 7395.24,-1877.24 7394.76,-1877.72 6845.24,-1877.72 cw(c6845.24,-1777.72) 6745.24,-1777.72 6745.24,-897.72 cw(c6845.24,-897.72) 6845.24,-797.72 7394.76,-797.72 cw(c7394.76,-897.72)
cut-out: 6734.76,253.25 6734.76,1132.28 cw(c6834.76,1132.28) 6834.76,1232.28 6835.24,1232.76 7384.76,1232.76 cw(c7384.76,1132.76) 7484.76,1132.76 7484.76,252.76 cw(c7384.76,252.76) 7384.76,152.76 6835.24,152.76 cw(c6835.24,252.76)
cut-out: 5394.76,263.25 5394.76,1142.28 cw(c5494.76,1142.28) 5494.76,1242.28 5495.24,1242.76 6044.76,1242.76 cw(c6044.76,1142.76) 6144.76,1142.76 6144.76,262.76 cw(c6044.76,262.76) 6044.76,162.76 5495.24,162.76 cw(c5495.24,262.76)
cut-out: 3994.76,253.25 3994.76,1132.28 cw(c4094.76,1132.28) 4094.76,1232.28 4095.24,1232.76 4644.76,1232.76 cw(c4644.76,1132.76) 4744.76,1132.76 4744.76,252.76 cw(c4644.76,252.76) 4644.76,152.76 4095.24,152.76 cw(c4095.24,252.76)
cut-out: 2634.76,243.25 2634.76,1122.28 cw(c2734.76,1122.28) 2734.76,1222.28 2735.24,1222.76 3284.76,1222.76 cw(c3284.76,1122.76) 3384.76,1122.76 3384.76,242.76 cw(c3284.76,242.76) 3284.76,142.76 2735.24,142.76 cw(c2735.24,242.76)
cut-out: 1210.24,253 1210.24,1132.04 cw(c1310.24,1132.04) 1310.24,1232.04 1310.73,1232.52 1860.24,1232.52 cw(c1860.24,1132.52) 1960.24,1132.52 1960.24,252.52 cw(c1860.24,252.52) 1860.24,152.52 1310.73,152.52 cw(c1310.73,252.52)
cut-out: -200,243 -200,1122.04 cw(c-100,1122.04) -100,1222.04 -99.52,1222.52 450,1222.52 cw(c450,1122.52) 550,1122.52 550,242.52 cw(c450,242.52) 450,142.52 -99.52,142.52 cw(c-99.52,242.52)
cut-out: 8489,-2188 cw(c8489,-2088) 8389,-2088 8389,-1338 cw(c8489,-1338) 8489,-1238 8639,-1238 cw(c8639,-1338) 8739,-1338 8739,-2088 cw(c8639,-2088) 8639,-2188

## Design rules (kind name [scope] priority, off if disabled: settings)
Clearance [All] p1: gap=4
ComponentClearance "Clearance SF Module" [InComponent('U5')] p1: gap=0 collisioncheckmode=3 verticalgap=-700 showdistances=FALSE
ComponentClearance "Clearance Backplane Header" [HasFootprint('PESC-02-12-02-01-S-VT-LC')] p2: gap=-10 collisioncheckmode=3 verticalgap=-700 showdistances=FALSE
ComponentClearance [All] p3: gap=5 collisioncheckmode=3 verticalgap=10 showdistances=FALSE
MinimumSolderMaskSliver [All] p1: minsoldermaskwidth=1
PlaneClearance [All] p1: clearance=20
PlaneConnect "High Current" [(InNet('NetJ1A_13')OR InNet('NetJ1B_13')OR InNet('NetJ1C_13')OR InNet('NetJ1D_13')OR InNet('NetJ1E_13')OR InNet('NetJ1F_13')OR InNet('NetJ1G_13')OR InNet('NetJ1H_13')OR InNet('NetJ1I_13')OR InNet('NetJ1J_13')OR InNet('NetJ1K_13')OR InNet('NetJ1L_13') OR InNet('NetK1A_11')OR InNet('NetK1B_11')OR InNet('NetK1C_11')OR InNet('NetK1D_11')OR InNet('NetK1E_11')OR InNet('NetK1F_11')OR InNet('NetK1G_11')OR InNet('NetK1H_11')OR InNet('NetK1I_11')OR InNet('NetK1J_11')OR InNet('NetK1K_11')OR InNet('NetK1L_11')or InNet('+24V')or InNet('RTN'))] p1: planeconnectstyle=Direct reliefexpansion=20 reliefentries=4 reliefconductorwidth=10 reliefairgap=10
PlaneConnect [All] p2: planeconnectstyle=Relief reliefexpansion=20 reliefentries=4 reliefconductorwidth=10 reliefairgap=10
PolygonConnect [All] p1: connectstyle=Relief reliefconductorwidth=10 reliefentries=4 polygonreliefangle="90 Angle"
RoomDefinition "Power Supplies" [InComponentClass('Power Supplies')] p1: confinementstyle=ConfineIn formatcopy=TRUE lockcomponents=FALSE outline -1405,-5907.48 11020,-5907.48 11020,5269.92 -1405,5269.92
RoomDefinition BackplaneSlot12 [InComponentClass('BackplaneSlot12')] p2: confinementstyle=ConfineIn formatcopy=TRUE lockcomponents=FALSE outline 6469.99,-4031.26 7669.99,-4031.26 7669.99,-1881.26 6469.99,-1881.26
RoomDefinition BackplaneSlot11 [InComponentClass('BackplaneSlot11')] p3: confinementstyle=ConfineIn formatcopy=TRUE lockcomponents=FALSE outline 5069.99,-4031.26 6269.99,-4031.26 6269.99,-1881.26 5069.99,-1881.26
RoomDefinition BackplaneSlot10 [InComponentClass('BackplaneSlot10')] p4: confinementstyle=ConfineIn formatcopy=TRUE lockcomponents=FALSE outline 3518.5,-4031.26 4871.5,-4031.26 4871.5,-1816.94 3518.5,-1816.94
RoomDefinition BackplaneSlot9 [InComponentClass('BackplaneSlot9')] p5: confinementstyle=ConfineIn formatcopy=TRUE lockcomponents=FALSE outline 2126.5,-4031.26 3469.99,-4031.26 3469.99,-1881.26 2126.5,-1881.26
RoomDefinition BackplaneSlot8 [InComponentClass('BackplaneSlot8')] p6: confinementstyle=ConfineIn formatcopy=TRUE lockcomponents=FALSE outline 869.99,-4031.26 2069.99,-4031.26 2069.99,-1881.26 869.99,-1881.26
RoomDefinition BackplaneSlot7 [InComponentClass('BackplaneSlot7')] p7: confinementstyle=ConfineIn formatcopy=TRUE lockcomponents=FALSE outline -530.01,-4031.26 669.99,-4031.26 669.99,-1881.26 -530.01,-1881.26
RoomDefinition BackplaneSlot6 [InComponentClass('BackplaneSlot6')] p8: confinementstyle=ConfineIn formatcopy=TRUE lockcomponents=FALSE outline 6470,1219.92 7670,1219.92 7670,3369.92 6470,3369.92
RoomDefinition BackplaneSlot5 [InComponentClass('BackplaneSlot5')] p9: confinementstyle=ConfineIn formatcopy=TRUE lockcomponents=FALSE outline 5070,1219.92 6270,1219.92 6270,3369.92 5070,3369.92
RoomDefinition BackplaneSlot4 [InComponentClass('BackplaneSlot4')] p10: confinementstyle=ConfineIn formatcopy=TRUE lockcomponents=FALSE outline 3670,1219.92 4870,1219.92 4870,3369.92 3670,3369.92
RoomDefinition BackplaneSlot3 [InComponentClass('BackplaneSlot3')] p11: confinementstyle=ConfineIn formatcopy=TRUE lockcomponents=FALSE outline 2270,1219.92 3470,1219.92 3470,3369.92 2270,3369.92
RoomDefinition BackplaneSlot2 [InComponentClass('BackplaneSlot2')] p12: confinementstyle=ConfineIn formatcopy=TRUE lockcomponents=FALSE outline 870,1219.92 2070,1219.92 2070,3369.92 870,3369.92
RoomDefinition BackplaneSlot1 [InComponentClass('BackplaneSlot1')] p13: confinementstyle=ConfineIn formatcopy=TRUE lockcomponents=FALSE outline -530,1219.92 670,1219.92 670,3369.92 -530,3369.92
RoomDefinition "780-00029,rev1,Pg3,Backplane, 19-in Rackmount Enclosure" [InComponentClass('780-00029,rev1,Pg3,Backplane, 19-in Rackmount Enclosure')] p14: confinementstyle=ConfineIn formatcopy=TRUE lockcomponents=FALSE outline -1430,-5360.08 13880,-5360.08 13880,5918.5 -1430,5918.5
RoutingVias [All] p1: holewidth=28 width=50 viastyle="Through Hole" minholewidth=10 minwidth=20 maxholewidth=50 maxwidth=100
SilkToSilkClearance [All] p1: silktosilkclearance=2
SilkscreenOverComponentPads [All] p1: minsilkscreentomaskgap=2
SolderMaskExpansion [All] p1: expansion=4
Width [All] p1: maxlimit=200 minlimit=5 preferedwidth=10
22 further rules are at their usual default settings.

## Classes and differential pairs
net class PWR_ON[1..12]: PWR_ON1 PWR_ON2 PWR_ON3 PWR_ON4 PWR_ON5 PWR_ON6 PWR_ON7 PWR_ON8 PWR_ON9 PWR_ON10 PWR_ON11 PWR_ON12
net class PWR_OFF[1..12]: PWR_OFF1 PWR_OFF2 PWR_OFF3 PWR_OFF4 PWR_OFF5 PWR_OFF6 PWR_OFF7 PWR_OFF8 PWR_OFF9 PWR_OFF10 PWR_OFF11 PWR_OFF12
net class IMON_SLOT[1..12]: IMON_SLOT1 IMON_SLOT2 IMON_SLOT3 IMON_SLOT4 IMON_SLOT5 IMON_SLOT6 IMON_SLOT7 IMON_SLOT8 IMON_SLOT9 IMON_SLOT10 IMON_SLOT11 IMON_SLOT12
component class "780-00029,rev1,Pg3,Backplane, 19-in Rackmount Enclosure": C1 C3 C4 D2 D3 D4 D5 J2 J3 J4 L1 P1 P3 R2 R3 R5 R6 R7 R8 R9 R10 R11 RN1 RN2 RN3 S1 S2 TP4 TP5 U5
component class BackplaneSlot1: C2A J1A K1A Q1A Q2A R4A TP10A TP11A U4A
component class BackplaneSlot2: C2B J1B K1B Q1B Q2B R4B TP10B TP11B U4B
component class BackplaneSlot3: C2C J1C K1C Q1C Q2C R4C TP10C TP11C U4C
component class BackplaneSlot4: C2D J1D K1D Q1D Q2D R4D TP10D TP11D U4D
component class BackplaneSlot5: C2E K1E Q1E Q2E R4E TP10E TP11E U4E
component class BackplaneSlot6: C2F J1F K1F Q1F Q2F R4F TP10F TP11F U4F
component class BackplaneSlot7: C2G J1G K1G Q1G Q2G R4G TP10G TP11G U4G
component class BackplaneSlot8: C2H J1H K1H Q1H Q2H R4H TP10H TP11H U4H
component class BackplaneSlot9: C2I J1I K1I Q1I Q2I R4I TP10I TP11I U4I
component class BackplaneSlot10: C2J J1J K1J Q1J Q2J R4J TP10J TP11J U4J
component class BackplaneSlot11: C2K J1K Q1K Q2K R4K TP10K TP11K U4K
component class BackplaneSlot12: C2L J1L K1L Q1L Q2L R4L TP10L TP11L U4L
channel class "780-00029,rev1,Pg2,Backplane, 19-in Rackmount Enclosure": BackplaneSlot1 BackplaneSlot2 BackplaneSlot3 BackplaneSlot4 BackplaneSlot5 BackplaneSlot6 BackplaneSlot7 BackplaneSlot8 BackplaneSlot9 BackplaneSlot10 BackplaneSlot11 BackplaneSlot12
component class "Power Supplies": BB1 BB2 BB3 BB4 BB5 BB6 C10 C11 C12 C13 C14 C15 C16 C17 C18 C19 C20 D1 L2 L3 P2 R1 R29 R30 R31 R32 R33 R34 R35 R36 R37 R38 R39 R40 TP1 TP2 TP3 TP17 TP27 TP28 TP29 U20 U21 U22 U23

## Components (designator, comment, footprint, x,y, rotation, side; value= is the part's Value field where it differs from the comment)
BB1 "Bus Bar" "Bus Bar 1.5\" pitch" 6700,1529.92 r180 bottom
BB2 "Bus Bar" "Bus Bar 1.5\" pitch" 7800,-4120.08 r90 bottom
BB3 "Bus Bar" "Bus Bar 1.5\" pitch" 6700,-3720.08 r180 bottom locked
BB4 "Bus Bar" "Bus Bar 1.5\" pitch" 6700,3029.92 r180 bottom
BB5 "Bus Bar" "Bus Bar 1.5\" pitch" 7600,-2620.08 r90 bottom
BB6 "Bus Bar" "Bus Bar 1.5\" pitch" 6700,-2220.08 r180 bottom
C1 "1u" 2012[0805] 850,3940 r270 bottom
C2A "Cap SMD" SMD_0805 -250,2319.92 r180 top (schematic designator C2)
C2B "Cap SMD" SMD_0805 1150,2319.92 r180 top (schematic designator C2)
C2C "Cap SMD" SMD_0805 2550,2319.92 r180 top (schematic designator C2)
C2D "Cap SMD" SMD_0805 3950,2319.92 r180 top (schematic designator C2)
C2E "Cap SMD" SMD_0805 5350,2319.92 r180 top (schematic designator C2)
C2F "Cap SMD" SMD_0805 6750,2319.92 r180 top (schematic designator C2)
C2G "Cap SMD" SMD_0805 -250.01,-2931.26 r180 top (schematic designator C2)
C2H "Cap SMD" SMD_0805 1149.99,-2931.26 r180 top (schematic designator C2)
C2I "Cap SMD" SMD_0805 2549.99,-2931.26 r180 top (schematic designator C2)
C2J "Cap SMD" SMD_0805 3949.99,-2931.26 r180 top (schematic designator C2)
C2K "Cap SMD" SMD_0805 5349.99,-2931.26 r180 top (schematic designator C2)
C2L "Cap SMD" SMD_0805 6749.99,-2931.26 r180 top (schematic designator C2)
C3 "Cap SMD" SMD_0805 3665,3750 r270 bottom
C4 "Cap SMD" SMD_0805 3665,4040 r90 bottom
C10 "1u" 2012[0805] 1349,-4602.48 r90 bottom
C11 "Cap SMD" SMD_0805 4038.8,-4625.73 r0 bottom
C12 "10V" SMD_CAP_7343 1349,-4257.48 r270 bottom
C13 "16V" SMD_0805 3613.8,-4280.73 r180 bottom
C14 "Cap SMD" SMD_0805 4301.8,-4675.73 r270 top
C15 "25V" SMD_0805 4293.8,-4475.73 r90 bottom
C16 "16V" SMD_CAP_3216 2020,-4390.48 r0 bottom
C17 "16V" SMD_CAP_3216 2015,-4805.48 r0 bottom
C18 "Low ESR" SMD_1206 2843.98,-4615.08 r0 bottom
C19 "Low ESR" SMD_1206 2598.98,-4615.08 r180 bottom
C20 "Cap SMD" SMD_0805 2548.98,-4820.08 r180 bottom
D1 "SL43-E3/57T" DO-214AB 3974.8,-4382.76 r90 bottom
D2 "PESD3V3L4UG" SOT-353 2320,-1412.48 r270 bottom
D3 "PESD3V3L4UG" SOT-353 2320,-1642.48 r270 bottom
D4 "PESD3V3L4UG" SOT-353 2320,-1527.48 r270 bottom
D5 "PESD3V3L4UG" SOT-353 2390,-1787.48 r270 bottom
J1A "PESC-02-12-02-01-S-VT-LC" PESC-02-12-02-01-S-VT-LC 265.51,2297.24 r0 top locked (schematic designator J1)
J1B "PESC-02-12-02-01-S-VT-LC" PESC-02-12-02-01-S-VT-LC 1665.51,2297.24 r0 top locked (schematic designator J1)
J1C "PESC-02-12-02-01-S-VT-LC" PESC-02-12-02-01-S-VT-LC 3065.51,2297.24 r0 top locked (schematic designator J1)
J1D "PESC-02-12-02-01-S-VT-LC" PESC-02-12-02-01-S-VT-LC 4465.51,2297.24 r0 top locked (schematic designator J1)
J1E "PESC-02-12-02-01-S-VT-LC" PESC-02-12-02-01-S-VT-LC 5865.51,2297.24 r0 top locked (schematic designator J1)
J1F "PESC-02-12-02-01-S-VT-LC" PESC-02-12-02-01-S-VT-LC 7265.51,2297.24 r0 top locked (schematic designator J1)
J1G "PESC-02-12-02-01-S-VT-LC" PESC-02-12-02-01-S-VT-LC 265.5,-2953.94 r0 top locked (schematic designator J1)
J1H "PESC-02-12-02-01-S-VT-LC" PESC-02-12-02-01-S-VT-LC 1665.5,-2953.94 r0 top locked (schematic designator J1)
J1I "PESC-02-12-02-01-S-VT-LC" PESC-02-12-02-01-S-VT-LC 3065.5,-2953.94 r0 top locked (schematic designator J1)
J1J "PESC-02-12-02-01-S-VT-LC" PESC-02-12-02-01-S-VT-LC 4465.5,-2953.94 r0 top locked (schematic designator J1)
J1K "PESC-02-12-02-01-S-VT-LC" PESC-02-12-02-01-S-VT-LC 5865.5,-2953.94 r0 top locked (schematic designator J1)
J1L "PESC-02-12-02-01-S-VT-LC" PESC-02-12-02-01-S-VT-LC 7265.5,-2953.94 r0 top locked (schematic designator J1)
J2 "15-91-0140" HDR2X7 9422,-4410.08 r180 bottom
J3 "RJHSE-3381" "RJ45, VERT MOUNT, NO MAGNETICS" 7199,4012 r90 bottom
J4 "61729-0010BLF" "USB Vertical PCB" 6033,4027 r0 bottom
K1A "Dual-Latching, 24V" "RELAY, TYCO RT1" -100,2779.92 r270 bottom (schematic designator K1)
K1B "Dual-Latching, 24V" "RELAY, TYCO RT1" 1300,2779.92 r270 bottom (schematic designator K1)
K1C "Dual-Latching, 24V" "RELAY, TYCO RT1" 2700,2779.92 r270 bottom (schematic designator K1)
K1D "Dual-Latching, 24V" "RELAY, TYCO RT1" 4100,2779.92 r270 bottom (schematic designator K1)
K1E "Dual-Latching, 24V" "RELAY, TYCO RT1" 5500,2779.92 r270 bottom (schematic designator K1)
K1F "Dual-Latching, 24V" "RELAY, TYCO RT1" 6900,2779.92 r270 bottom (schematic designator K1)
K1G "Dual-Latching, 24V" "RELAY, TYCO RT1" -100.01,-2471.26 r270 bottom (schematic designator K1)
K1H "Dual-Latching, 24V" "RELAY, TYCO RT1" 1299.99,-2471.26 r270 bottom (schematic designator K1)
K1I "Dual-Latching, 24V" "RELAY, TYCO RT1" 2699.99,-2471.26 r270 bottom (schematic designator K1)
K1J "Dual-Latching, 24V" "RELAY, TYCO RT1" 4099.99,-2471.26 r270 bottom (schematic designator K1)
K1K "Dual-Latching, 24V" "RELAY, TYCO RT1" 5499.99,-2471.26 r270 bottom (schematic designator K1)
K1L "Dual-Latching, 24V" "RELAY, TYCO RT1" 6899.99,-2471.26 r270 bottom (schematic designator K1)
L1 "S558-5999-J1-F" "10/100BT Magetics module" 6833,4039 r270 bottom
L2 "445-3869-1-ND" "Inductor TDC SLF" 3683.8,-4475.73 r90 bottom
L3 "445-3872-2-ND" "Inductor TDC SLF" 2788.98,-4385.08 r0 bottom
P1 "Header 4" "HDR1X4 for IDC" 4011,3796 r90 bottom
P2 "Header PWR 4 Pin" "HDR-4 pin w/screw" 6500,642.52 r90 bottom
P3 "COAX MMCX" MMCX2.54-V5 4798,3825 r180 bottom
Q1A "2N7002" SOT23A -100,3064.92 r180 top (schematic designator Q1)
Q1B "2N7002" SOT23A 1300,3064.92 r180 top (schematic designator Q1)
Q1C "2N7002" SOT23A 2700,3064.92 r180 top (schematic designator Q1)
Q1D "2N7002" SOT23A 4100,3064.92 r180 top (schematic designator Q1)
Q1E "2N7002" SOT23A 5500,3064.92 r180 top (schematic designator Q1)
Q1F "2N7002" SOT23A 6900,3064.92 r180 top (schematic designator Q1)
Q1G "2N7002" SOT23A -100.01,-2186.26 r180 top (schematic designator Q1)
Q1H "2N7002" SOT23A 1299.99,-2186.26 r180 top (schematic designator Q1)
Q1I "2N7002" SOT23A 2699.99,-2186.26 r180 top (schematic designator Q1)
Q1J "2N7002" SOT23A 4099.99,-2186.26 r180 top (schematic designator Q1)
Q1K "2N7002" SOT23A 5499.99,-2186.26 r180 top (schematic designator Q1)
Q1L "2N7002" SOT23A 6899.99,-2186.26 r180 top (schematic designator Q1)
Q2A "2N7002" SOT23A -395,3264.92 r180 top (schematic designator Q2)
Q2B "2N7002" SOT23A 1005,3264.92 r180 top (schematic designator Q2)
Q2C "2N7002" SOT23A 2405,3264.92 r180 top (schematic designator Q2)
Q2D "2N7002" SOT23A 3805,3264.92 r180 top (schematic designator Q2)
Q2E "2N7002" SOT23A 5205,3264.92 r180 top (schematic designator Q2)
Q2F "2N7002" SOT23A 6605,3264.92 r180 top (schematic designator Q2)
Q2G "2N7002" SOT23A -395.01,-1986.26 r180 top (schematic designator Q2)
Q2H "2N7002" SOT23A 1004.99,-1986.26 r180 top (schematic designator Q2)
Q2I "2N7002" SOT23A 2404.99,-1986.26 r180 top (schematic designator Q2)
Q2J "2N7002" SOT23A 4035.5,-1948.94 r180 top (schematic designator Q2)
Q2K "2N7002" SOT23A 5204.99,-1986.26 r180 top (schematic designator Q2)
Q2L "2N7002" SOT23A 6604.99,-1986.26 r180 top (schematic designator Q2)
R1 "Res 0805" SMD_0805 8363,632.52 r270 bottom
R2 "Res 0805" SMD_0805 850,3775 r90 bottom
R3 "Res 0805" SMD_0805 -95,3905 r0 bottom
R4A "Res 0805" SMD_0805 -400,2424.92 r270 top (schematic designator R4)
R4B "Res 0805" SMD_0805 1000,2424.92 r270 top (schematic designator R4)
R4C "Res 0805" SMD_0805 2400,2424.92 r270 top (schematic designator R4)
R4D "Res 0805" SMD_0805 3800,2424.92 r270 top (schematic designator R4)
R4E "Res 0805" SMD_0805 5200,2424.92 r270 top (schematic designator R4)
R4F "Res 0805" SMD_0805 6600,2424.92 r270 top (schematic designator R4)
R4G "Res 0805" SMD_0805 -400.01,-2826.26 r270 top (schematic designator R4)
R4H "Res 0805" SMD_0805 999.99,-2826.26 r270 top (schematic designator R4)
R4I "Res 0805" SMD_0805 2399.99,-2826.26 r270 top (schematic designator R4)
R4J "Res 0805" SMD_0805 3799.99,-2826.26 r270 top (schematic designator R4)
R4K "Res 0805" SMD_0805 5199.99,-2826.26 r270 top (schematic designator R4)
R4L "Res 0805" SMD_0805 6599.99,-2826.26 r270 top (schematic designator R4)
R5 "4.7k" 2012[0805] 8930,-4105.08 r0 top
R6 "Res 0805" SMD_0805 7417,4142 r180 top
R7 "Res 0805" SMD_0805 7430,3602 r180 top
R8 "Res 0805" SMD_0805 3840,3750 r270 bottom
R9 "Res 0805" SMD_0805 3750,3750 r90 bottom
R10 "Res 0805" SMD_0805 3840,4040 r90 bottom
R11 "Res 0805" SMD_0805 3755,4040 r270 bottom
R29 "Res 0805" SMD_0805 4143.8,-4380.73 r0 top
R30 "Res 0805" SMD_0805 4208.8,-4275.73 r270 bottom
R31 "Res 0805" SMD_0805 4288.8,-4275.73 r270 bottom
R32 "Res 0805" SMD_0805 4213.8,-4685.73 r270 bottom
R33 "Res 0805" SMD_0805 4303.8,-4680.73 r90 bottom
R34 "Res 0805" SMD_0805 4213.8,-4680.73 r90 top
R35 "Res 0805" SMD_0805 2683.98,-4825.08 r0 top
R36 "Res 0805" SMD_0805 2548.98,-4690.08 r180 bottom
R37 "Res 0805" SMD_0805 2613.98,-4715.08 r270 top
R38 "Res 0805" SMD_0805 2503.98,-4530.08 r0 bottom
R39 "Res 0805" SMD_0805 2548.98,-4755.08 r0 bottom
R40 "Res 0805" SMD_0805 2867.98,-4803.08 r90 bottom
RN1 "RES ARRAY  x4 10K" "RES ARRAY 0603 x 4" 3100,-1192.48 r90 bottom
RN2 "RES ARRAY  x4 10K" "RES ARRAY 0603 x 4" 3130,-1537.48 r90 bottom
RN3 "RES ARRAY  x4 10K" "RES ARRAY 0603 x 4" 3130,-1717.48 r90 bottom
S1 "B3U-1000P" B3U-1000P 1030,3903.92 r180 bottom
S2 "B3U-1000P" B3U-1000P 134,3903.92 r180 bottom
TP1 "Test point" PAD_80D_052H 8327,-847.08 r0 top
TP2 "Test point" PAD_80D_052H 8537,-847.08 r0 top
TP3 "Test point" PAD_80D_052H 8767,-847.08 r0 top
TP4 "Test Point SMD" "SMD_TEST POINT" 3525,3675 r90 bottom
TP5 "Test Point SMD" "SMD_TEST POINT" 3530,4130 r90 bottom
TP10A "Test point" PAD_80D_052H -199,1291.92 r0 bottom (schematic designator TP10)
TP10B "Test point" PAD_80D_052H 1201,1291.92 r0 bottom (schematic designator TP10)
TP10C "Test point" PAD_80D_052H 2601,1291.92 r0 bottom (schematic designator TP10)
TP10D "Test point" PAD_80D_052H 4001,1291.92 r0 bottom (schematic designator TP10)
TP10E "Test point" PAD_80D_052H 5401,1291.92 r0 bottom (schematic designator TP10)
TP10F "Test point" PAD_80D_052H 6801,1291.92 r0 bottom (schematic designator TP10)
TP10G "Test point" PAD_80D_052H -199.01,-3959.26 r0 bottom (schematic designator TP10)
TP10H "Test point" PAD_80D_052H 1200.99,-3959.26 r0 bottom (schematic designator TP10)
TP10I "Test point" PAD_80D_052H 2600.99,-3959.26 r0 bottom (schematic designator TP10)
TP10J "Test point" PAD_80D_052H 4000.99,-3959.26 r0 bottom (schematic designator TP10)
TP10K "Test point" PAD_80D_052H 5400.99,-3959.26 r0 bottom (schematic designator TP10)
TP10L "Test point" PAD_80D_052H 6800.99,-3959.26 r0 bottom (schematic designator TP10)
TP11A "Test point" PAD_80D_052H -215,3318.92 r0 bottom (schematic designator TP11)
TP11B "Test point" PAD_80D_052H 1185,3318.92 r0 bottom (schematic designator TP11)
TP11C "Test point" PAD_80D_052H 2585,3318.92 r0 bottom (schematic designator TP11)
TP11D "Test point" PAD_80D_052H 3985,3318.92 r0 bottom (schematic designator TP11)
TP11E "Test point" PAD_80D_052H 5385,3318.92 r0 bottom (schematic designator TP11)
TP11F "Test point" PAD_80D_052H 6785,3318.92 r0 bottom (schematic designator TP11)
TP11G "Test point" PAD_80D_052H -215.01,-1932.26 r0 bottom (schematic designator TP11)
TP11H "Test point" PAD_80D_052H 1184.99,-1932.26 r0 bottom (schematic designator TP11)
TP11I "Test point" PAD_80D_052H 2195.5,-2478.94 r0 bottom (schematic designator TP11)
TP11J "Test point" PAD_80D_052H 3585.5,-2498.94 r0 bottom (schematic designator TP11)
TP11K "Test point" PAD_80D_052H 5384.99,-1932.26 r0 bottom (schematic designator TP11)
TP11L "Test point" PAD_80D_052H 6784.99,-1932.26 r0 bottom (schematic designator TP11)
TP17 "Test Point SMD" "SMD_TEST POINT" 1349,-4867.48 r90 bottom
TP27 "Test Point SMD" "SMD_TEST POINT" 3744.8,-4817.73 r0 bottom
TP28 "Test Point SMD" "SMD_TEST POINT" 1856,-4224 r270 bottom
TP29 "Test Point SMD" "SMD_TEST POINT" 3148.68,-4581.24 r90 bottom
U4A "100 V/V" SMD_SOT23_5 -255,2429.92 r270 top (schematic designator U4)
U4B "100 V/V" SMD_SOT23_5 1145,2429.92 r270 top (schematic designator U4)
U4C "100 V/V" SMD_SOT23_5 2545,2429.92 r270 top (schematic designator U4)
U4D "100 V/V" SMD_SOT23_5 3945,2429.92 r270 top (schematic designator U4)
U4E "100 V/V" SMD_SOT23_5 5345,2429.92 r270 top (schematic designator U4)
U4F "100 V/V" SMD_SOT23_5 6745,2429.92 r270 top (schematic designator U4)
U4G "100 V/V" SMD_SOT23_5 -255.01,-2821.26 r270 top (schematic designator U4)
U4H "100 V/V" SMD_SOT23_5 1144.99,-2821.26 r270 top (schematic designator U4)
U4I "100 V/V" SMD_SOT23_5 2544.99,-2821.26 r270 top (schematic designator U4)
U4J "100 V/V" SMD_SOT23_5 3944.99,-2821.26 r270 top (schematic designator U4)
U4K "100 V/V" SMD_SOT23_5 5344.99,-2821.26 r270 top (schematic designator U4)
U4L "100 V/V" SMD_SOT23_5 6744.99,-2821.26 r270 top (schematic designator U4)
U5 "SuperFin Module" "SuperFin Footprint" 2085.5,-1988.94 r90 bottom locked
U20 "PT78ST105S" PSIP_3_SMD 523,-4499.08 r270 bottom
U21 "LT3682" DD12/DFN12 4238.8,-4585.73 r90 bottom
U22 "LTC1144" S8_M 2025,-4605.48 r90 bottom
U23 "LTC3631" DD8/DFN8 2728.98,-4730.08 r180 bottom

## Footprints (in the part's own frame and the unit in brackets; to place one, negate y for a bottom-side part, rotate by r counter-clockwise, add the part's x,y. Pads: shape width x height; smd on the part's side, far side on the other; paste and mask are expansions set on the pad)
"10/100BT Magetics module" [mil] "bel p/n S558-6-5999-J1-F"
  rect 25x70 smd: 1(0,0) 2(50,0) 3(100,0) 4(150,0) 5(200,0) 6(250,0) 7(300,0) 8(350,0) 9(350,355) 10(300,355) 11(250,355) 12(200,355) 13(150,355) 14(100,355) 15(50,355) 16(0,355)
  silkscreen extent -50,5 375,300
2012[0805] [mm] "Chip Resistor; Body 2.0 x 1.3 mm (LxW typ)"
  rect 1.3x1.5 smd: 1(-0.95,0) 2(0.95,0)
B3U-1000P [mil] "Pushbutton without ground terminal, without boss"
  rect 40x67 smd: 1(-71,0) 2(71,0)
  silkscreen extent -45,-50 45,50
"Bus Bar 1.5\" pitch" [mil] "Rigid/Bus Bar"
  round 110 hole 70: 1(0,0) 1(1500,0) 1(3000,0) 1(4500,0) 1(6000,0)
  silkscreen extent -100,-40 6100,40
DD8/DFN8 [mm]
  oval 0.675x0.25 smd: 1(-1.412,0.75) 2(-1.412,0.25) 3(-1.412,-0.25) 4(-1.412,-0.75) 5(1.412,-0.75) 6(1.412,-0.25) 7(1.412,0.25) 8(1.412,0.75)
  rect 1.65x2.38 smd: 9(0,0)
  silkscreen extent -2.43,-1.55 1.55,1.62, body extent -1.55,-1.55 1.55,1.55, height 0.8
DD12/DFN12 [mm] "SON, 12-Leads, Body 3x3 mm, Pitch 0.45mm, IPC High Density"
  oval 0.6x0.25 smd: 1(0,0) 2(0,-0.45) 3(0,-0.9) 4(0,-1.35) 5(0,-1.8) 6(0,-2.25) 7(2.9,-2.25) 8(2.9,-1.8) 9(2.9,-1.35) 10(2.9,-0.9) 11(2.9,-0.45) 12(2.9,0)
  rect 1.65x2.38 smd: 13(1.45,-1.125)
  silkscreen extent -0.97,-2.68 3,0.5, body extent -0.1,-2.68 3,0.42, height 0.8
DO-214AB [mil] "DO-214-AB/SMC; 2 C-Bend Leads; Body 7.9 x 5.9 mm, inc. leads (LxW)"
  rect 60x126 smd: 1(-121.81,0) 2(121.81,0)
  silkscreen extent -170,-120 179,120
"HDR1X4 for IDC" [mm] "Connector; Header; 4 Position"
  rect 1.5x1.5 hole 0.9: 1(0,0)
  round 1.5 hole 0.9: 2(2.54,0) 3(5.08,0) 4(7.62,0)
  silkscreen extent -1.4,-2.54 8.89,2.54
HDR2X7 [mm] "Connector; Header; 7x2 Position"
  rect 1.5x1.5 hole 0.9: 1(0,0)
  round 1.5 hole 0.9: 2(0,2.54) 3(2.54,0) 4(2.54,2.54) 5(5.08,0) 6(5.08,2.54) 7(7.62,0) 8(7.62,2.54) 9(10.16,0) 10(10.16,2.54) 11(12.7,0) 12(12.7,2.54) 13(15.24,0) 14(15.24,2.54)
  silkscreen extent -1.27,-1.27 16.51,3.81
"HDR-4 pin w/screw" [mm] "TYCO p/n 796867-4"
  round 2.5 hole 1.5: 1(-7.62,0) 2(-2.54,0) 3(2.54,0) 4(7.62,0)
  silkscreen extent -15.16,-6.25 15.24,6.25
"Inductor TDC SLF" [mm] "SLF series"
  rect 2.2x1.5 smd: 1(0,3.2) 2(0,-3.2)
  silkscreen extent -3.5,-3.5 3.5,3.5
MMCX2.54-V5 [mm] "Connector; RF Coaxial, MMCX, Thru-Hole; 5 Position; Vertical"
  round 1.4 hole 0.85: 1(0,0) 2(-1.27,-1.27) 3(1.27,-1.27) 4(1.27,1.27) 5(-1.27,1.27)
  silkscreen extent -1.75,-1.75 1.75,1.75
PAD_80D_052H [mil]
  round 80 hole 52: 1(0,0)
PESC-02-12-02-01-S-VT-LC [mil] "SAMTEC FEM SOCKETS, PWR(4), SIGNAL(12), VERT MOUNT"
  round 59.06 hole 98 unplated: 0(-87,-875) 0(-87,875)
  round 65 hole 40: 1(-150,-100) 2(-50,-100) 3(50,-100) 4(150,-100) 5(-150,0) 6(-50,0) 7(50,0) 8(150,0) 9(-150,100) 10(-50,100) 11(50,100) 12(150,100)
  round 80 hole 52: 13(-150,-625) 13(-150,-525) 13(-50,-625) 13(-50,-525) 13(50,-625) 13(50,-525) 13(150,-625) 13(150,-525) 14(-150,-375) 14(-150,-275) 14(-50,-375) 14(-50,-275) 14(50,-375) 14(50,-275) 14(150,-375) 14(150,-275) 15(-150,275) 15(-150,375) 15(-50,275) 15(-50,375) 15(50,275) 15(50,375) 15(150,275) 15(150,375) 16(-150,525) 16(-150,625) 16(-50,525) 16(-50,625) 16(50,525) 16(50,625) 16(150,525) 16(150,625)
  silkscreen extent -225,-1025 250,1025
PSIP_3_SMD [mil] "Plastic Single-In-Line Module, 3 pins"
  rect 150x200 smd: 0(-225,550) 0(225,550)
  rect 40x200 smd: 1(100,-575) 2(0,-575) 3(-100,-575)
  silkscreen extent -450,-470 450,470
"RELAY, TYCO RT1" [mm] "TYCO/SCHRACK RT314F24"
  rect 2.5x2.5 hole 1.3 unplated: 1(0,0)
  round 2.5 hole 1.3 unplated: 2(0,7.5) 3(0,3.75) 11(20,0) 11(20,7.5) 12(15,0) 12(15,7.5) 14(25,0) 14(25,7.5)
  silkscreen extent -2.5,-2.5 27.5,10
"RES ARRAY 0603 x 4" [mm]
  rect 0.44x1.15 smd: 1(0,0.1) 2(0,2.05) 3(0.8,0.1) 4(0.8,2.05) 5(1.6,0.1) 6(1.6,2.05) 7(2.4,0.1) 8(2.4,2.05)
  silkscreen extent -0.6,-0.6 3,1.8
"RJ45, VERT MOUNT, NO MAGNETICS" [mil] "Amphenol p/n RJHSE-3381"
  rect 55x55 hole 35: 1(0,0)
  round 55 hole 35: 2(-40,-100) 3(-80,0) 4(-120,-100) 5(-160,0) 6(-200,-100) 7(-240,0) 8(-280,-100) 9(130,95) 10(40,95) 11(-320,95) 12(-410,95)
  round 85 hole 62: 13(180,32) 14(-460,32)
  round 116.14 hole 127.95 unplated: MH1(110,-135) MH2(-390,-135)
  silkscreen extent -460,-235 180,305
S8_M [mm] "SOIC, 8-Leads, Body 4.9x3.9mm, Pitch 1.27mm, IPC Low Density"
  oval 2.5x0.7 smd: 1(-2.45,1.905) 2(-2.45,0.635) 3(-2.45,-0.635) 4(-2.45,-1.905) 5(2.45,-1.905) 6(2.45,-0.635) 7(2.45,0.635) 8(2.45,1.905)
  silkscreen extent -2.57,-2.5 0.8,2.93, body extent -2,-2.5 2,2.5, height 1.76
SMD_0805 [mil]
  rect 50x50 smd: 1(-45,0) 2(45,0)
  silkscreen extent -1,-1 1,1
SMD_1206 [mil]
  rect 63x75 smd: 1(-55,0) 2(55,0)
SMD_CAP_3216 [mil]
  rect 78x48 smd: 1(55,0) 2(-55,0)
  silkscreen extent -108,-65 134,38
SMD_CAP_7343 [mil]
  rect 102x94 smd: NEG(-126,0) POS(126,0)
  silkscreen extent -145,-80 220,80
SMD_SOT23_5 [mil]
  rect 28x36 smd: 1(37,43) 2(0,43) 3(-37,43)
  rect 36x36 smd: 4(-37,-43) 5(37,-43)
  silkscreen extent -57,-25 57,85
"SMD_TEST POINT" [mil] "Keystone 5015"
  rect 135x70 smd: 1(0,0)
SOT23A [mm] "SOT-23; 3 Leads; Body 3.0 x 2.5 mm, inc. leads (LxW max)"
  rect 0.9x0.95 smd: 1(-0.95,-1.175) 2(0.95,-1.175) 3(0,1.175)
  silkscreen extent -2.07,-1.3 1.3,1.18
SOT-353 [mm]
  rect 0.5x0.5 smd: 1(0,0) 3(0,-1.5) 4(1.8,-1.5) 5(1.8,0)
  rect 0.5x0.4 smd: 2(0,-0.75)
  silkscreen extent 0.5,-1.9 2.3,0.4
"SuperFin Footprint" [mm] "SAMTEC QTH-060-01-L-D-A (x2)"
  round 5.6 hole 4.22: 0(0,43) 0(84,0) 0(84,43)
  round 1 hole 1.02 unplated: 0(38.04,13.08) 0(38.04,33.15) 1(-0.44,13.08) 1(-0.44,33.15)
  rect 0.3x1.45 smd paste+0 mask+0.05: A1(36.05,12.03) A2(36.05,18.21) A3(35.55,12.03) A4(35.55,18.21) A5(35.05,12.03) A6(35.05,18.21) A7(34.55,12.03) A8(34.55,18.21) A9(34.05,12.03) A10(34.05,18.21) A11(33.55,12.03) A12(33.55,18.21) A13(33.05,12.03) A14(33.05,18.21) A15(32.55,12.03) A16(32.55,18.21) A17(32.05,12.03) A18(32.05,18.21) A19(31.55,12.03) A20(31.55,18.21) A21(31.05,12.03) A22(31.05,18.21) A23(30.55,12.03) A24(30.55,18.21) A25(30.05,12.03) A26(30.05,18.21) A27(29.55,12.03) A28(29.55,18.21) A29(29.05,12.03) A30(29.05,18.21) A31(28.55,12.03) A32(28.55,18.21) A33(28.05,12.03) A34(28.05,18.21) A35(27.55,12.03) A36(27.55,18.21) A37(27.05,12.03) A38(27.05,18.21) A39(26.55,12.03) A40(26.55,18.21) A41(26.05,12.03) A42(26.05,18.21) A43(25.55,12.03) A44(25.55,18.21) A45(25.05,12.03) A46(25.05,18.21) A47(24.55,12.03) A48(24.55,18.21) A49(24.05,12.03) A50(24.05,18.21) A51(23.55,12.03) A52(23.55,18.21) A53(23.05,12.03) A54(23.05,18.21) A55(22.55,12.03) A56(22.55,18.21) A57(22.05,12.03) A58(22.05,18.21) A59(21.55,12.03) A60(21.55,18.21) A61(16.05,12.03) A62(16.05,18.21) A63(15.55,12.03) A64(15.55,18.21) A65(15.05,12.03) A66(15.05,18.21) A67(14.55,12.03) A68(14.55,18.21) A69(14.05,12.03) A70(14.05,18.21) A71(13.55,12.03) A72(13.55,18.21) A73(13.05,12.03) A74(13.05,18.21) A75(12.55,12.03) A76(12.55,18.21) A77(12.05,12.03) A78(12.05,18.21) A79(11.55,12.03) A80(11.55,18.21) A81(11.05,12.03) A82(11.05,18.21) A83(10.55,12.03) A84(10.55,18.21) A85(10.05,12.03) A86(10.05,18.21) A87(9.55,12.03) A88(9.55,18.21) A89(9.05,12.03) A90(9.05,18.21) A91(8.55,12.03) A92(8.55,18.21) A93(8.05,12.03) A94(8.05,18.21) A95(7.55,12.03) A96(7.55,18.21) A97(7.05,12.03) A98(7.05,18.21) A99(6.55,12.03) A100(6.55,18.21) A101(6.05,12.03) A102(6.05,18.21) A103(5.55,12.03) A104(5.55,18.21) A105(5.05,12.03) A106(5.05,18.21) A107(4.55,12.03) A108(4.55,18.21) A109(4.05,12.03) A110(4.05,18.21) A111(3.55,12.03) A112(3.55,18.21) A113(3.05,12.03) A114(3.05,18.21) A115(2.55,12.03) A116(2.55,18.21) A117(2.05,12.03) A118(2.05,18.21) A119(1.55,12.03) A120(1.55,18.21) B1(36.05,32.1) B2(36.05,38.28) B3(35.55,32.1) B4(35.55,38.28) B5(35.05,32.1) B6(35.05,38.28) B7(34.55,32.1) B8(34.55,38.28) B9(34.05,32.1) B10(34.05,38.28) B11(33.55,32.1) B12(33.55,38.28) B13(33.05,32.1) B14(33.05,38.28) B15(32.55,32.1) B16(32.55,38.28) B17(32.05,32.1) B18(32.05,38.28) B19(31.55,32.1) B20(31.55,38.28) B21(31.05,32.1) B22(31.05,38.28) B23(30.55,32.1) B24(30.55,38.28) B25(30.05,32.1) B26(30.05,38.28) B27(29.55,32.1) B28(29.55,38.28) B29(29.05,32.1) B30(29.05,38.28) B31(28.55,32.1) B32(28.55,38.28) B33(28.05,32.1) B34(28.05,38.28) B35(27.55,32.1) B36(27.55,38.28) B37(27.05,32.1) B38(27.05,38.28) B39(26.55,32.1) B40(26.55,38.28) B41(26.05,32.1) B42(26.05,38.28) B43(25.55,32.1) B44(25.55,38.28) B45(25.05,32.1) B46(25.05,38.28) B47(24.55,32.1) B48(24.55,38.28) B49(24.05,32.1) B50(24.05,38.28) B51(23.55,32.1) B52(23.55,38.28) B53(23.05,32.1) B54(23.05,38.28) B55(22.55,32.1) B56(22.55,38.28) B57(22.05,32.1) B58(22.05,38.28) B59(21.55,32.1) B60(21.55,38.28) B61(16.05,32.1) B62(16.05,38.28) B63(15.55,32.1) B64(15.55,38.28) B65(15.05,32.1) B66(15.05,38.28) B67(14.55,32.1) B68(14.55,38.28) B69(14.05,32.1) B70(14.05,38.28) B71(13.55,32.1) B72(13.55,38.28) B73(13.05,32.1) B74(13.05,38.28) B75(12.55,32.1) B76(12.55,38.28) B77(12.05,32.1) B78(12.05,38.28) B79(11.55,32.1) B80(11.55,38.28) B81(11.05,32.1) B82(11.05,38.28) B83(10.55,32.1) B84(10.55,38.28) B85(10.05,32.1) B86(10.05,38.28) B87(9.55,32.1) B88(9.55,38.28) B89(9.05,32.1) B90(9.05,38.28) B91(8.55,32.1) B92(8.55,38.28) B93(8.05,32.1) B94(8.05,38.28) B95(7.55,32.1) B96(7.55,38.28) B97(7.05,32.1) B98(7.05,38.28) B99(6.55,32.1) B100(6.55,38.28) B101(6.05,32.1) B102(6.05,38.28) B103(5.55,32.1) B104(5.55,38.28) B105(5.05,32.1) B106(5.05,38.28) B107(4.55,32.1) B108(4.55,38.28) B109(4.05,32.1) B110(4.05,38.28) B111(3.55,32.1) B112(3.55,38.28) B113(3.05,32.1) B114(3.05,38.28) B115(2.55,32.1) B116(2.55,38.28) B117(2.05,32.1) B118(2.05,38.28) B119(1.55,32.1) B120(1.55,38.28)
  rect 2.54x0.64 smd: A121(20.355,15.12) A121(37.245,15.12) A122(0.355,15.12) A122(17.245,15.12) B121(20.355,35.19) B121(37.245,35.19) B122(0.355,35.19) B122(17.245,35.19)
  rect 4.7x0.64 smd: A121(25.625,15.12) A121(31.975,15.12) A122(5.625,15.12) A122(11.975,15.12) B121(25.625,35.19) B121(31.975,35.19) B122(5.625,35.19) B122(11.975,35.19)
  silkscreen extent -3,-3.5 87,46.5
"USB Vertical PCB" [mm] "EDAC USB typeB p/n 690-004-260-023"
  round 2 hole 0.92: 1(-4.77,2.71) 2(-7.27,2.71) 3(-7.27,-0.49) 4(-4.77,-0.49)
  round 4 hole 2.3: 5(-12.04,0) 6(0,0)
  silkscreen extent -12,-4.6 0,6.6

## Part data
C1 C10: library part Cap, "Capacitor"
C2A C2B C2C C2D C2E C2F C2G C2H C2I C2J C2K C2L C3 C4 C11 C14 C20: "Capacitor"
C12: library part "Cap Tant 35V", "outline 6.0mm x 3.2mm"
C13 C15 C18 C19: library part "Cap SMD", "Capacitor"
C16 C17: library part "Cap Tant 16V", "outline 3.2mm x 1.6mm"
D1: library part Diode, "Default Diode"
D2 D3 D4 D5: library part "ESD Diode 3.3V Quad", "Quad ESD Diode 3.3V"
J1A J1B J1C J1D J1E J1F J1G J1H J1I J1J J1K J1L: "SAMTEC, SIGNAL(12)+PWR(4), VERT"
J2: library part "Header 7X2", "Header, 7-Pin, Dual row"
J3: library part "CONN RJ-45 w/o magnetics", "Vertical PC mount, w/o magnetics"
J4: library part "Header 6", "Header, 6-Pin"
K1A K1B K1C K1D K1E K1F K1G K1H K1I K1J K1K K1L: library part "Relay SPDT, 16A", "Tyco/Schrack RT314F24, Dual Latching"
L1: library part "Ethernet Magnetics module", "10/100BT Magnetics Module"
L2 L3: library part "Inductor SMD 10uH 1.8A", "Inductor"
P1: "Header, 4-Pin"
P2: library part "Header 4 PWR", "Header, 4-Pin"
P3: library part COAX-M, "RF Coaxial PCB Connector, MMCX; Thru-Hole, Vertical Mount Plug,  50 Ohm Impedance"
Q1A Q1B Q1C Q1D Q1E Q1F Q1G Q1H Q1I Q1J Q1K Q1L Q2A Q2B Q2C Q2D Q2E Q2F Q2G Q2H Q2I Q2J Q2K Q2L: "N-Chan MOSFET"
R1 R2 R3 R4A R4B R4C R4D R4E R4F R4G R4H R4I R4J R4K R4L R6 R7 R8 R9 R10 R11 R29 R30 R31 R32 R33 R34 R35 R36 R37 R38 R39 R40: library part "Res SMD", "Resistor 0805"
R5: library part Res3, "Resistor"
RN1 RN2 RN3: "Resistor Array 4 Isolated"
S1 S2: library part SW-PB, "Switch"
TP1 TP2 TP3 TP10A TP10B TP10C TP10D TP10E TP10F TP10G TP10H TP10I TP10J TP10K TP10L TP11A TP11B TP11C TP11D TP11E TP11F TP11G TP11H TP11I TP11J TP11K TP11L: "Test Point"
TP4 TP5 TP17 TP27 TP28 TP29: "SMD loop test point"
U4A U4B U4C U4D U4E U4F U4G U4H U4I U4J U4K U4L: library part INA195, "Current Shunt Monitor"
U20: library part "Volt Reg", "Voltage Regulator"
U21: "1A uPwr Step-Down switching regulator"
U22: "IC VOLT CONV SW-CAP W/SHTDN8SOIC"
U23: "IC CONV STP-DWN ADJ 8-DFN"

## Free pads (board coordinates)
  round 216.54 hole 127.95: 0(200,-5250.79) 0(1600,-5250.79) 0(3000,-5250.79) 0(4400,-5250.79) 0(5800,-5250.79) 0(7200,-5250.79) 2(-400,-657.48) 2(800,-657.48) 2(2000,-657.48) 2(3000,-657.48) 2(4200,-657.48) 2(5200,-657.48) 2(6200,-657.48) 2(7400,-657.48) 3(-400,0) 3(800,0) 3(2200,0) 3(3600,0) 3(5000,0) 3(6400,0) 3(7400,0) 4(200,4593.7) 4(1600,4593.7) 4(3000,4593.7) 4(4400,4593.7) 4(5800,4593.7) 4(7200,4593.7)

## Via types
v1: diameter 20, hole 10, Top Layer (*.GTL) to Bottom Layer, 213 vias
v2: diameter 50, hole 28, Top Layer (*.GTL) to Bottom Layer, 87 vias
v3: diameter 24, hole 10, Top Layer (*.GTL) to Bottom Layer, 50 vias
v4: diameter 25.98, hole 12.99, Top Layer (*.GTL) to Bottom Layer, tented top, 4 vias
v5: diameter 30, hole 15, Top Layer (*.GTL) to Bottom Layer, 3 vias

## Nets (pads, with @x,y where several pads share a name; then routed paths per layer and width w, separated by ;. In a path a pad name is that pad's centre, name@x,y a point inside that pad or via, vN(x,y) a via of type N, cw(c..) or ccw(c..) an arc to the next point about the centre after c; other vN are vias at no path point)
+3.3V: C13.2 J1A.11 J1B.11 J1C.11 J1D.11 J1E.11 J1F.11 J1G.11 J1H.11 J1I.11 J1J.11 J1K.11 J1L.11 L2.2 R5.2 R32.2 TP27.1 U5.B121 U21.5 | length 143.4
  Bottom Layer w10: v3(3644.8,-4818.73) 3645.8,-4817.73 TP27.1@3744.8,-4817.73 ; v3(4213.8,-4773.73) R32.2@4213.8,-4730.73
+5V: C1.1 C12.POS S1.1 S2.1 TP17.1 U5.A1 U20.3 | length 6378.6
  Mid-Layer 1 w25: v1(941,-470.48) 957.52,-487 2542.48,-487 v1(2557,-472.48)
  Bottom Layer w20: U20.3@1098,-4399.08 1227.4,-4399.08 1243,-4383.48 C12.POS@1349,-4383.48 ; U5.A1@2559.12,-566.83 v1@2559.12,-474.6
  Bottom Layer w25: C1.1@850,3977.4 1077.6,3977.4 1101,3954 S1.1@1101,3903.92 ; v1(941,-470.48) 941,-2438.44 939,-2440.44 939,-3482.73 942.6,-3486.33 942.6,-4399.08 U20.3@1098,-4399.08 ; v1(2557,-472.48) v1@2559.12,-474.6
+12V: C2A.2 C2B.2 C2C.2 C2D.2 C2E.2 C2F.2 C2G.2 C2H.2 C2I.2 C2J.2 C2K.2 C2L.2 C19.2 C20.2 L3.2 R8.2 R10.2 R36.2 R38.2 TP29.1 U4A.5 U4B.5 U4C.5 U4D.5 U4E.5 U4F.5 U4G.5 U4H.5 U4I.5 U4J.5 U4K.5 U4L.5 U5.A5 U22.8 | length 1926.9
  Top Layer (*.GTL) w10: U4G.5@-298.01,-2858.26 -298.01,-2928.26 C2G.2@-295.01,-2931.26 v1(-295.01,-2986.26) ; U4A.5@-298,2392.92 -298,2322.92 C2A.2@-295,2319.92 v1(-295,2264.92) ; U4H.5@1101.99,-2858.26 1101.99,-2928.26 C2H.2@1104.99,-2931.26 v1(1104.99,-2986.26) ; U4B.5@1102,2392.92 1102,2322.92 C2B.2@1105,2319.92 v1(1105,2264.92) ; U4I.5@2501.99,-2858.26 2501.99,-2928.26 C2I.2@2504.99,-2931.26 v1(2504.99,-2986.26) ; U4C.5@2502,2392.92 2502,2322.92 C2C.2@2505,2319.92 v1(2505,2264.92) ; U4J.5@3901.99,-2858.26 3901.99,-2928.26 C2J.2@3904.99,-2931.26 v1(3904.99,-2986.26) ; U4D.5@3902,2392.92 3902,2322.92 C2D.2@3905,2319.92 v1(3905,2264.92) ; U4K.5@5301.99,-2858.26 5301.99,-2928.26 C2K.2@5304.99,-2931.26 v1(5304.99,-2986.26) ; U4E.5@5302,2392.92 5302,2322.92 C2E.2@5305,2319.92 v1(5305,2264.92) ; U4L.5@6701.99,-2858.26 6701.99,-2928.26 C2L.2@6704.99,-2931.26 v1(6704.99,-2986.26) ; U4F.5@6702,2392.92 6702,2322.92 C2F.2@6705,2319.92 v1(6705,2264.92)
  Bottom Layer w10: U5.A5@2559.12,-609.02 2611.02,-609.02 v1(2618,-616) ; v1(3840,3640) R8.2@3840,3705 ; R10.2@3840,4085 v1(3840,4160)
  Bottom Layer w20: v3(2453.98,-4820.08) C20.2@2503.98,-4820.08
  Bottom Layer w30: U22.8@2100,-4509.02 2148.46,-4509.02 v3(2149,-4508.48) ; v3(3077.98,-4578.08) TP29.1@3152.98,-4578.08
  other v3: 2647.98,-4522.08 2697.98,-4522.08 2603.98,-4521.08 2817.98,-4355.08 2735.98,-4354.08 2627.98,-4352.08 2528.98,-4351.08
+24V: BB1.1 BB2.1 BB3.1 C10.1 C15.2 C18.2 K1A.3 K1B.3 K1C.3 K1D.3 K1E.3 K1F.3 K1G.3 K1H.3 K1I.3 K1J.3 K1K.3 K1L.3 P2.1 P2.2 R4A.1 R4B.1 R4C.1 R4D.1 R4E.1 R4F.1 R4G.1 R4H.1 R4I.1 R4J.1 R4K.1 R4L.1 R29.1 R35.2 U4A.3 U4B.3 U4C.3 U4D.3 U4E.3 U4F.3 U4G.3 U4H.3 U4I.3 U4J.3 U4K.3 U4L.3 U5.B55 U5.B71 U5.B81 U20.1 U21.12 U23.2 | length 4318.4
  Top Layer (*.GTL) w10: -400.01,-2741.26 -395.01,-2736.26 -235.01,-2736.26 -215.01,-2756.26 -215.01,-2781.26 U4G.3@-212.01,-2784.26 ; -400,2509.92 -395,2514.92 -235,2514.92 -215,2494.92 -215,2469.92 U4A.3@-212,2466.92 ; 999.99,-2741.26 1004.99,-2736.26 1164.99,-2736.26 1184.99,-2756.26 1184.99,-2781.26 U4H.3@1187.99,-2784.26 ; 1000,2509.92 1005,2514.92 1165,2514.92 1185,2494.92 1185,2469.92 U4B.3@1188,2466.92 ; 2399.99,-2741.26 2404.99,-2736.26 2564.99,-2736.26 2584.99,-2756.26 2584.99,-2781.26 U4I.3@2587.99,-2784.26 ; 2400,2509.92 2405,2514.92 2565,2514.92 2585,2494.92 2585,2469.92 U4C.3@2588,2466.92 ; R35.2@2728.98,-4825.08 2771.98,-4825.08 v3(2774.98,-4828.08) ; 3799.99,-2741.26 3804.99,-2736.26 3964.99,-2736.26 3984.99,-2756.26 3984.99,-2781.26 U4J.3@3987.99,-2784.26 ; 3800,2509.92 3805,2514.92 3965,2514.92 3985,2494.92 3985,2469.92 U4D.3@3988,2466.92 ; R29.1@4098.8,-4380.73 4101.8,-4377.73 v3(4101.8,-4327.73) ; 5199.99,-2741.26 5204.99,-2736.26 5364.99,-2736.26 5384.99,-2756.26 5384.99,-2781.26 U4K.3@5387.99,-2784.26 ; 5200,2509.92 5205,2514.92 5365,2514.92 5385,2494.92 5385,2469.92 U4E.3@5388,2466.92 ; 6599.99,-2741.26 6604.99,-2736.26 6764.99,-2736.26 6784.99,-2756.26 6784.99,-2781.26 U4L.3@6787.99,-2784.26 ; 6600,2509.92 6605,2514.92 6765,2514.92 6785,2494.92 6785,2469.92 U4F.3@6788,2466.92
  Top Layer (*.GTL) w50: R4G.1@-400.01,-2781.26 -400.01,-2741.26 v2(-400.01,-2686.26) ; R4A.1@-400,2469.92 -400,2509.92 v2(-400,2564.92) ; R4H.1@999.99,-2781.26 999.99,-2741.26 v2(999.99,-2686.26) ; R4B.1@1000,2469.92 1000,2509.92 v2(1000,2564.92) ; R4I.1@2399.99,-2781.26 2399.99,-2741.26 v2(2399.99,-2686.26) ; R4C.1@2400,2469.92 2400,2509.92 v2(2400,2564.92) ; R4J.1@3799.99,-2781.26 3799.99,-2741.26 v2(3799.99,-2686.26) ; R4D.1@3800,2469.92 3800,2509.92 v2(3800,2564.92) ; R4K.1@5199.99,-2781.26 5199.99,-2741.26 v2(5199.99,-2686.26) ; R4E.1@5200,2469.92 5200,2509.92 v2(5200,2564.92) ; R4L.1@6599.99,-2781.26 6599.99,-2741.26 v2(6599.99,-2686.26) ; R4F.1@6600,2469.92 6600,2509.92 v2(6600,2564.92)
  Bottom Layer w20: v2(1099,-4712.48) 1098,-4711.48 U20.1@1098,-4599.08 1242.4,-4599.08 1280.8,-4637.48 1346.6,-4637.48 C10.1@1349,-4639.88
  other v3: 2947.98,-4703.08 2903.98,-4701.08 2949.98,-4638.08 2948.98,-4574.08 4313.8,-4470.73 4248.8,-4430.73 4248.8,-4385.73 4313.8,-4385.73
-12V: C16.2 TP28.1 U5.A3 U22.5 | length 4876.5
  Top Layer (*.GTL) w12: v1(1975,-4173) v1@2536,-4173
  Bottom Layer w12: TP28.1@1856,-4224 1934,-4224 1975,-4265 ; U22.5@1950,-4509.02 1950,-4405.48 C16.2@1965,-4390.48 1975,-4380.48 1975,-4265 ; v1(1975,-4173) 1975,-4265 ; v1(2533,-4171) 2541,-4163 2541,-3536 2589,-3488 2589,-3015.53 2614.99,-2989.54 2614.99,-2972.98 2611,-2968.99 2611,-2496.35 2611.56,-2495.79 2611.56,-2446.73 2611,-2446.17 2611,-2038.26 2630.54,-2018.72 2630.54,-1993.8 2611,-1974.26 2611,-1968 2725,-1854 2725,-613 2701.33,-589.33 U5.A3@2559.12,-589.33
EMU: J2.2 U5.A47
ETHERLED_ACT: R7.1 U5.A103
ETHERLED_FD: R6.1 U5.A105
ETHERRX+: L1.11 U5.B67
ETHERRX-: L1.9 U5.B65
ETHERTX+: L1.16 U5.A70
ETHERTX-: L1.14 U5.A68